# EAGLE board Arduino-Fio-Panel-v31 (EAGLE 6.5.0), part 1 of 3
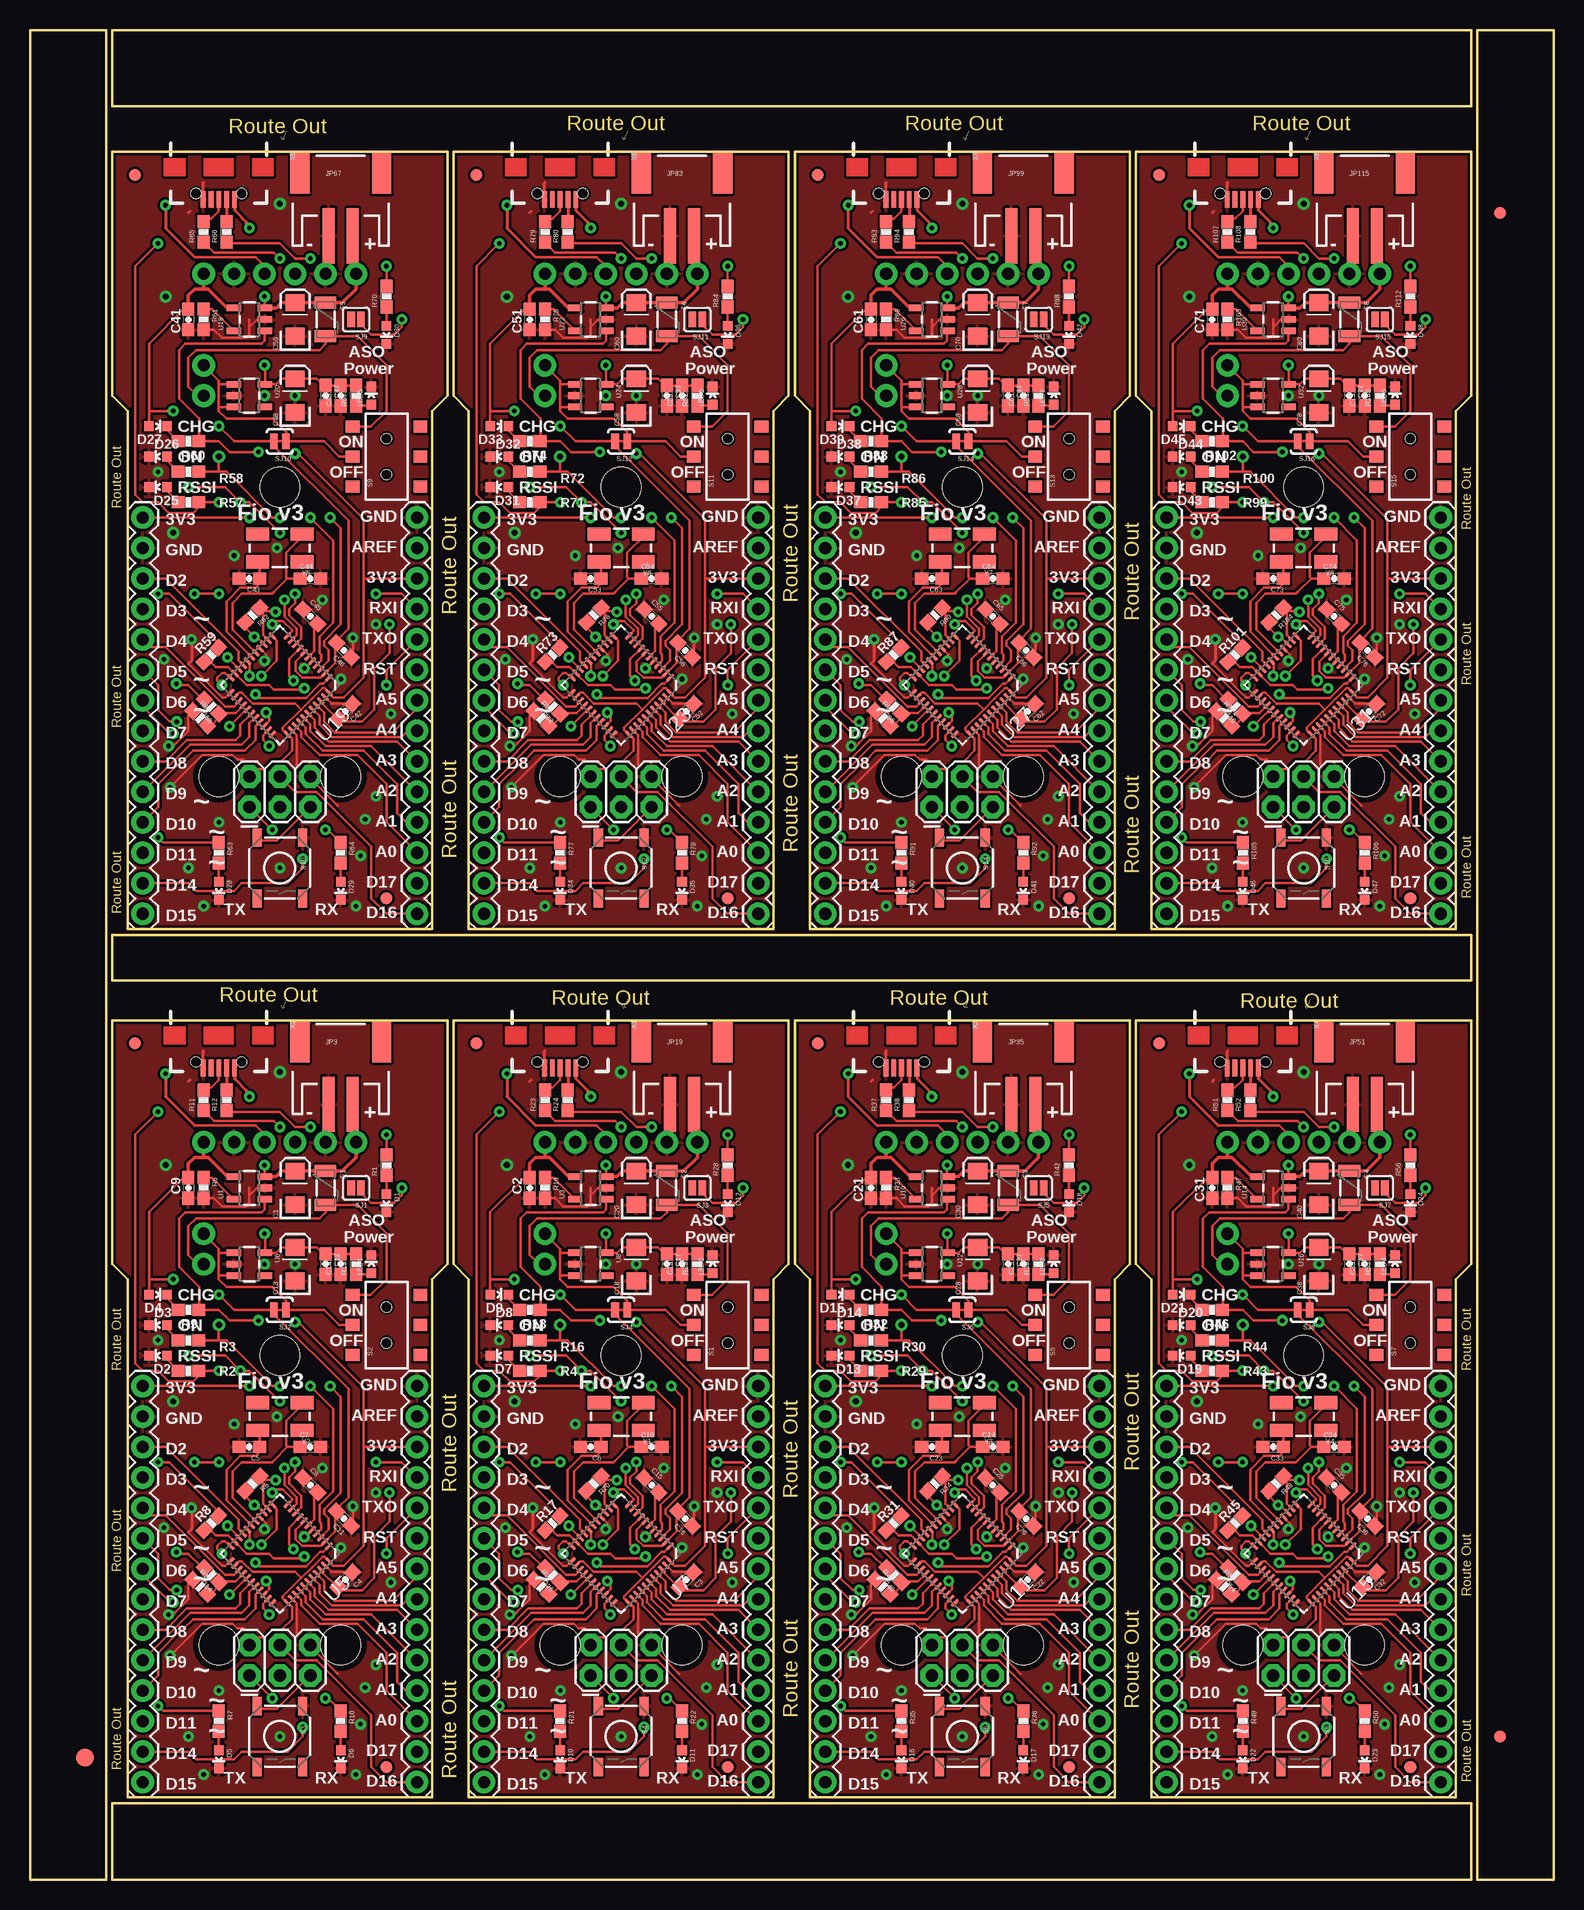
[diagram p0: board, top side]
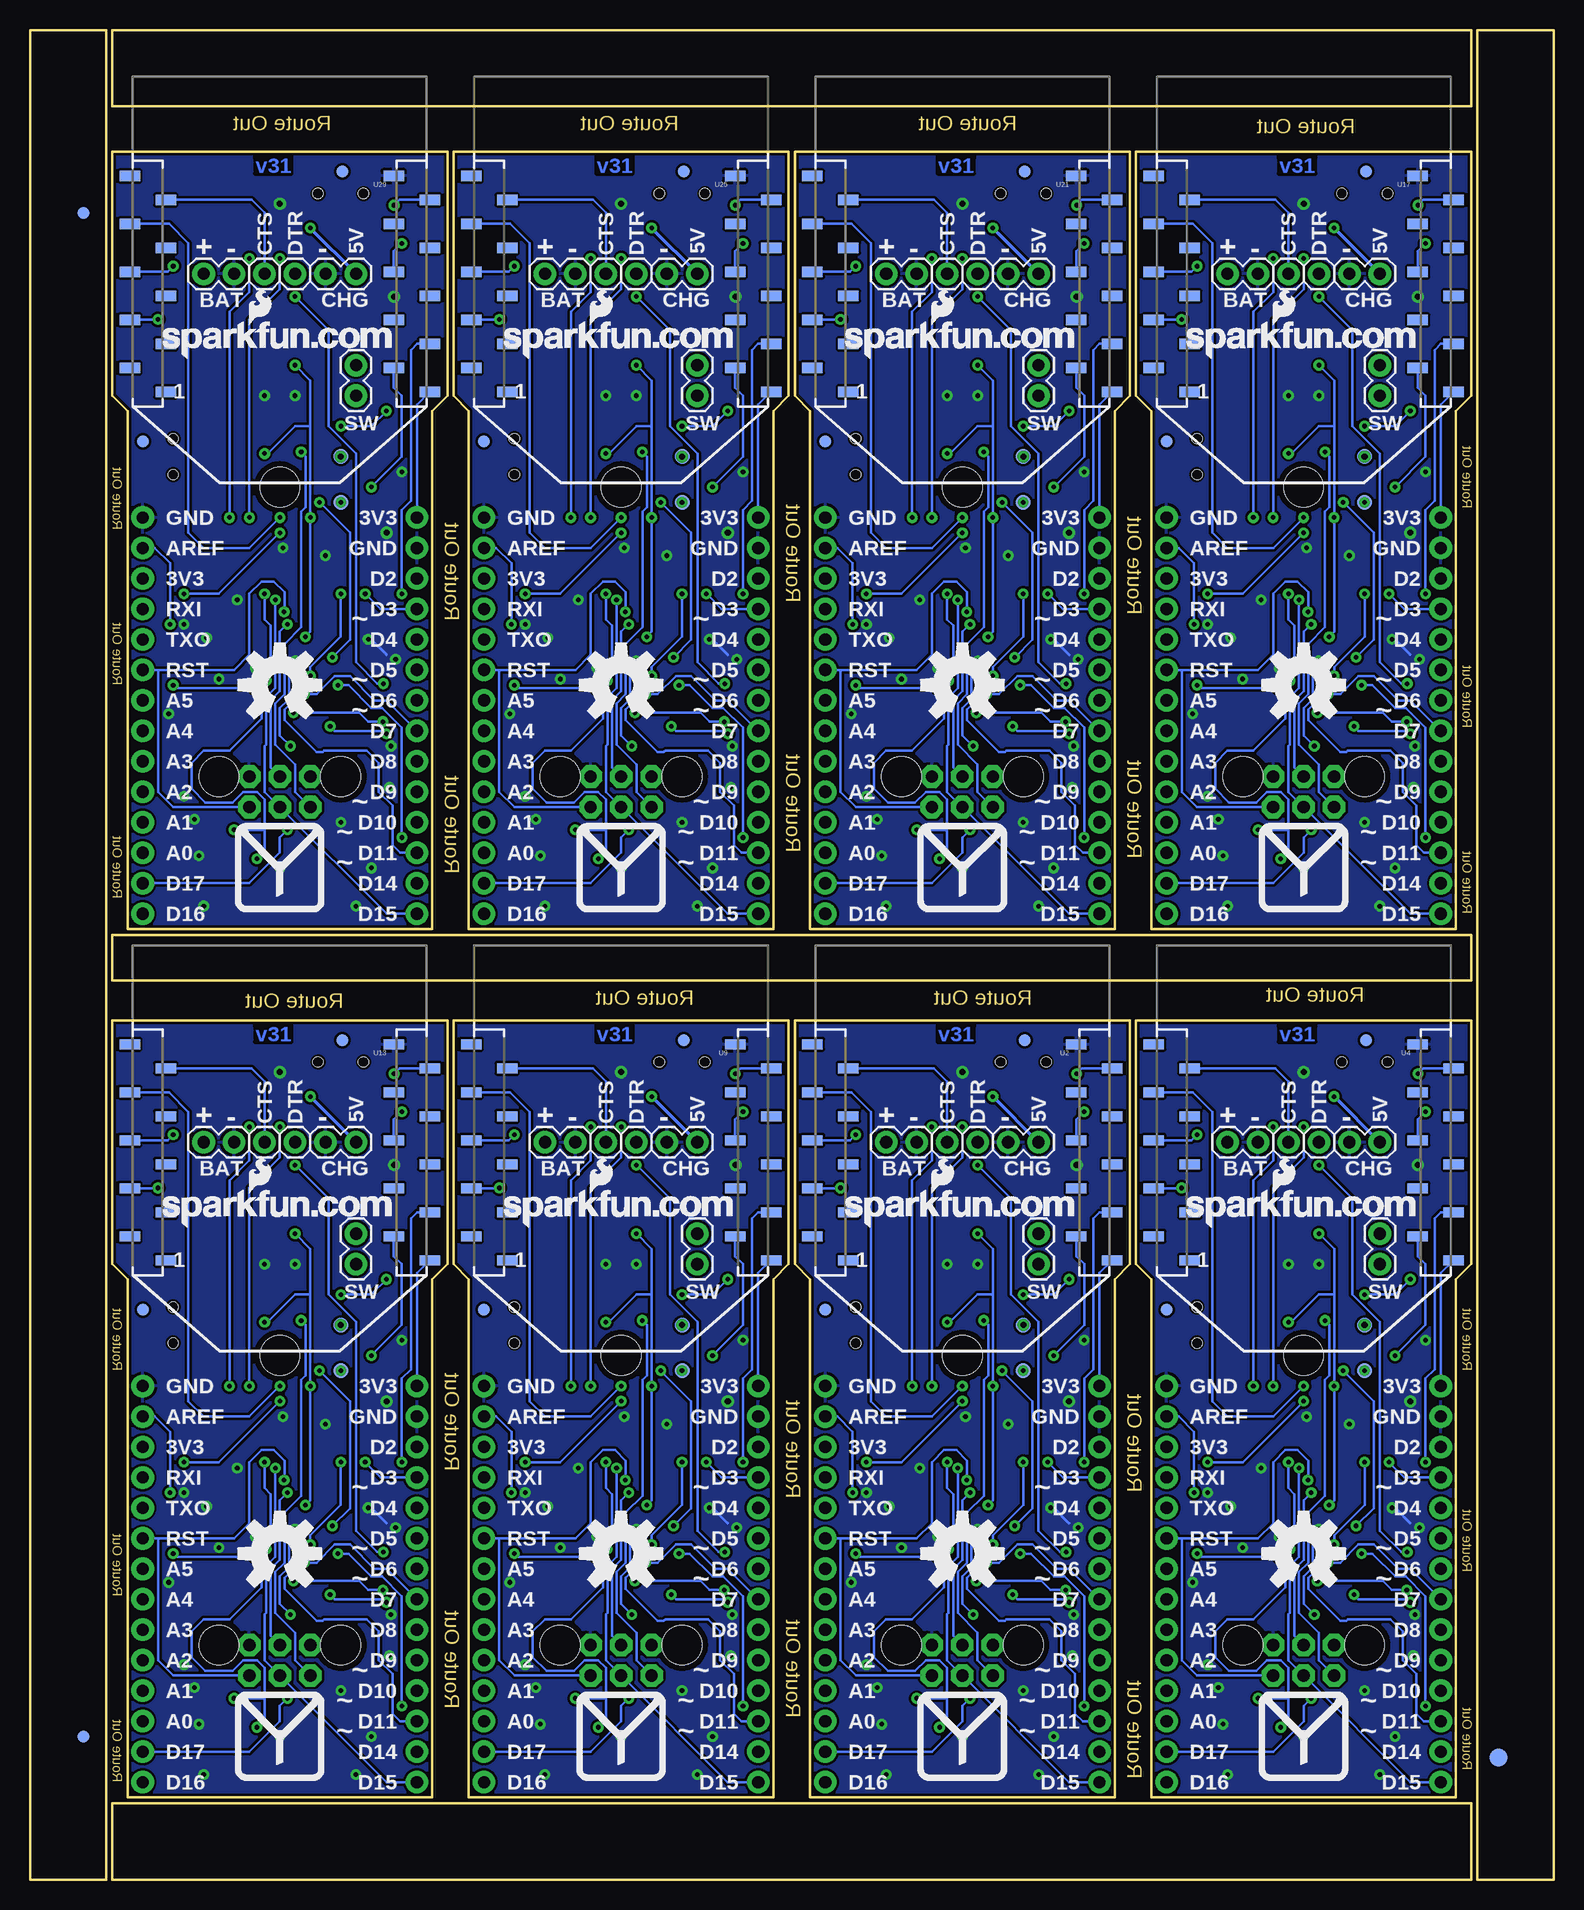
[diagram p1: board, bottom side, seen from below]

Size 127 x 154.18 mm. Coordinates in mm from the lower left corner, seen from the top.
Outline: 33.53,50.04 33.53,6.86 8.13,6.86 8.13,50.04 6.86,51.31 6.86,71.63 34.8,71.63 34.8,51.31 33.53,50.04
Outline: 61.98,50.04 61.98,6.86 36.58,6.86 36.58,50.04 35.31,51.31 35.31,71.63 63.25,71.63 63.25,51.31 61.98,50.04
Outline: 90.42,50.04 90.42,6.86 65.02,6.86 65.02,50.04 63.75,51.31 63.75,71.63 91.69,71.63 91.69,51.31 90.42,50.04
Outline: 118.87,50.04 118.87,6.86 93.47,6.86 93.47,50.04 92.2,51.31 92.2,71.63 120.14,71.63 120.14,51.31 118.87,50.04
Outline: 33.53,122.43 33.53,79.25 8.13,79.25 8.13,122.43 6.86,123.7 6.86,144.02 34.8,144.02 34.8,123.7 33.53,122.43
Outline: 61.98,122.43 61.98,79.25 36.58,79.25 36.58,122.43 35.31,123.7 35.31,144.02 63.25,144.02 63.25,123.7 61.98,122.43
Outline: 90.42,122.43 90.42,79.25 65.02,79.25 65.02,122.43 63.75,123.7 63.75,144.02 91.69,144.02 91.69,123.7 90.42,122.43
Outline: 118.87,122.43 118.87,79.25 93.47,79.25 93.47,122.43 92.2,123.7 92.2,144.02 120.14,144.02 120.14,123.7 118.87,122.43
Outline: 6.86,74.93 120.14,74.93 120.14,78.74 6.86,78.74 6.86,74.93
Outline: 6.35,0 6.35,154.18 0,154.18 0,0 6.35,0
Outline: 6.86,0 120.14,0 120.14,6.35 6.86,6.35 6.86,0
Outline: 120.65,0 127,0 127,154.18 120.65,154.18 120.65,0
Outline: 120.14,154.18 6.86,154.18 6.86,147.83 120.14,147.83 120.14,154.18
Copper layers (1*16): Top 0.035mm / dielectric 1.5mm / Bottom 0.035mm
Design rules "SparkFun *": minimum track width 7mil, minimum drill 15mil, track to track 5mil, track to pad 5mil, pad to pad 5mil, via to via 5mil, smd to smd 5mil, copper to edge 8mil, drill to drill 8mil, minimum pad ring 12mil, minimum via ring 10mil, stop-mask expansion 4mil, vias tented up to drill 20mil, thermal gap 10mil
Net classes: 0 Default: width 0.203 mm; 2 LEDPower: width 0.203 mm; 3 ButtonSignal: width 0.203 mm

## Footprints (pad centres in the part's own frame; a part is rotated, then mirrored left to right if it is on the bottom)
EIA3216 = smd 1.4 x 1.6: A 1.4,0; C -1.4,0
0603-CAP = smd 1.1 x 1: 1 -0.85,0; 2 0.85,0
LED-0603 = smd 0.8 x 0.8: A 0,-0.75; C 0,0.75
FIDUCIAL-1.5X3 = smd 1.5 x 1.5: 1 0,0
FIDUCIAL-1X2 = smd 1 x 1: 1 0,0
PTC-1206 = smd 1 x 1.8: 1 -1.4,0; 2 1.4,0
1X14 = drill 1.016 pad 1.88: 1 0,0; 2 2.54,0; 3 5.08,0; 4 7.62,0; 5 10.16,0; 6 12.7,0; 7 15.24,0; 8 17.78,0; 9 20.32,0; 10 22.86,0; 11 25.4,0; 12 27.94,0; 13 30.48,0; 14 33.02,0
JST-2-SMD = smd 1 x 4.6: 1 -1,-3.7; 2 1,-3.7 | smd 1.6 x 3.4: NC1 -3.4,1.5; NC2 3.4,1.5
2X3 = drill 1.016 pad 1.88 octagon: 1 0,0; 2 0,2.54; 3 2.54,0; 4 2.54,2.54; 5 5.08,0; 6 5.08,2.54
STAND-OFF = hole 3.302: 0,0
1X02 = drill 1.016 pad 1.88: 1 0,0; 2 2.54,0
1X01 = drill 1.016 pad 1.88: 1 0,0
0603-RES = smd 1.1 x 1: 1 -0.85,0; 2 0.85,0
AYZ0202 = smd 1 x 1.15: 1 -2.5,2.825; 2 0,2.825; 3 2.5,2.825; 4 -2.5,-2.825; 5 0,-2.825; 6 2.5,-2.825 | hole 0.85: 1.5,0; -1.5,0
TACTILE_SWITCH_SMD = smd 1.524 x 0.762: 1 -2.54,1.905; 2 2.54,1.905; 3 -2.54,-1.905; 4 2.54,-1.905
SJ_2S = smd 0.635 x 1.27: 1 -0.412,0; 2 0.412,0
SJ_2S-TRACE = smd 0.635 x 1.27: 1 -0.508,0; 2 0.508,0
PAD.03X.05 = smd 1.27 x 1.27: P$1 0,0
SOT23-5 = smd 0.55 x 1.2: 1 -0.95,-1.3; 2 0,-1.3; 3 0.95,-1.3; 4 0.95,1.3; 5 -0.95,1.3
XBEE-SMD = smd 1.7 x 0.85: 1 -12.5,20; 2 -9.5,18; 3 -12.5,16; 4 -9.5,14; 5 -12.5,12; 6 -9.5,10; 7 -12.5,8; 8 -9.5,6; 9 -12.5,4; 10 -9.5,2; 11 12.5,2; 12 9.5,4; 13 12.5,6; 14 9.5,8; 15 12.5,10; 16 9.5,12; 17 12.5,14; 18 9.5,16; 19 12.5,18; 20 9.5,20
QFN-44-NOPAD_1:1 = smd 0.8 x 0.3: 1 -3.337,2.458; 2 -3.337,1.958; 3 -3.337,1.479; 4 -3.337,0.979; 5 -3.337,0.5; 6 -3.337,0; 7 -3.337,-0.5; 8 -3.337,-0.979; 9 -3.337,-1.479; 10 -3.337,-1.958; 11 -3.337,-2.458; 23 3.337,-2.458; 24 3.337,-1.958; 25 3.337,-1.479; 26 3.337,-0.979; 27 3.337,-0.5; 28 3.337,0; 29 3.337,0.5; 30 3.337,0.979; 31 3.337,1.479; 32 3.337,1.958; 33 3.337,2.458 | smd 0.3 x 0.8: 12 -2.458,-3.337; 13 -1.958,-3.337; 14 -1.479,-3.337; 15 -0.979,-3.337; 16 -0.5,-3.337; 17 0,-3.337; 18 0.5,-3.337; 19 0.979,-3.337; 20 1.479,-3.337; 21 1.958,-3.337; 22 2.458,-3.337; 34 2.458,3.337; 35 1.958,3.337; 36 1.479,3.337; 37 0.979,3.337; 38 0.5,3.337; 39 0,3.337; 40 -0.5,3.337; 41 -0.979,3.337; 42 -1.479,3.337; 43 -1.958,3.337; 44 -2.458,3.337
USB-B-MICRO-SMD_V03 = smd 1.4 x 0.4: D+1 2.7,0; D-1 2.7,0.65; GND1 2.7,-1.3; ID1 2.7,-0.65; VBUS 2.7,1.3 | hole 0.85: 2.2,1.9; 2.2,-1.9
CRYSTAL-SMD-5X3 = smd 1.9 x 1.1: 1 -1.85,-1.15; 2 1.85,-1.15; 3 1.85,1.15; 4 -1.85,1.15

## Placement (x,y rotation side)
C1  10uF  [EIA3216]  22.1,57.66 90 top
C2  4.7uF  [0603-CAP]  41.66,57.66 270 top
C3  0.1uF  [0603-CAP]  54.72,25 225 top
C4  0.1uF  [0603-CAP]  26.27,25 225 top
C5  22pF  [0603-CAP]  18.29,36.07 180 top
C6  22pF  [0603-CAP]  46.74,36.07 180 top
C7  22pF  [0603-CAP]  23.37,36.07 0 top
C8  1uF  [0603-CAP]  23.37,32.89 315 top
C9  4.7uF  [0603-CAP]  13.21,57.66 270 top
C10  22pF  [0603-CAP]  51.82,36.07 0 top
C11  1uF  [0603-CAP]  26.16,30.1 135 top
C12  1uF  [0603-CAP]  24.64,51.31 270 top
C13  10uF  [EIA3216]  22.1,51.31 90 top
C14  0.1uF  [0603-CAP]  25.91,51.31 90 top
C15  1uF  [0603-CAP]  51.82,32.89 315 top
C16  1uF  [0603-CAP]  54.61,30.1 135 top
C17  1uF  [0603-CAP]  53.09,51.31 270 top
C18  10uF  [EIA3216]  50.55,51.31 90 top
C19  0.1uF  [0603-CAP]  54.36,51.31 90 top
C20  10uF  [EIA3216]  50.55,57.66 90 top
C21  4.7uF  [0603-CAP]  70.1,57.66 270 top
C22  0.1uF  [0603-CAP]  83.17,25 225 top
C23  22pF  [0603-CAP]  75.18,36.07 180 top
C24  22pF  [0603-CAP]  80.26,36.07 0 top
C25  1uF  [0603-CAP]  80.26,32.89 315 top
C26  1uF  [0603-CAP]  83.06,30.1 135 top
C27  1uF  [0603-CAP]  81.53,51.31 270 top
C28  10uF  [EIA3216]  78.99,51.31 90 top
C29  0.1uF  [0603-CAP]  82.8,51.31 90 top
C30  10uF  [EIA3216]  78.99,57.66 90 top
C31  4.7uF  [0603-CAP]  98.55,57.66 270 top
C32  0.1uF  [0603-CAP]  111.62,25 225 top
C33  22pF  [0603-CAP]  103.63,36.07 180 top
C34  22pF  [0603-CAP]  108.71,36.07 0 top
C35  1uF  [0603-CAP]  108.71,32.89 315 top
C36  1uF  [0603-CAP]  111.51,30.1 135 top
C37  1uF  [0603-CAP]  109.98,51.31 270 top
C38  10uF  [EIA3216]  107.44,51.31 90 top
C39  0.1uF  [0603-CAP]  111.25,51.31 90 top
C40  10uF  [EIA3216]  107.44,57.66 90 top
C41  4.7uF  [0603-CAP]  13.21,130.05 270 top
C42  0.1uF  [0603-CAP]  26.27,97.39 225 top
C43  22pF  [0603-CAP]  18.29,108.46 180 top
C44  22pF  [0603-CAP]  23.37,108.46 0 top
C45  1uF  [0603-CAP]  23.37,105.28 315 top
C46  1uF  [0603-CAP]  26.16,102.49 135 top
C47  1uF  [0603-CAP]  24.64,123.7 270 top
C48  10uF  [EIA3216]  22.1,123.7 90 top
C49  0.1uF  [0603-CAP]  25.91,123.7 90 top
C50  10uF  [EIA3216]  22.1,130.05 90 top
C51  4.7uF  [0603-CAP]  41.66,130.05 270 top
C52  0.1uF  [0603-CAP]  54.72,97.39 225 top
C53  22pF  [0603-CAP]  46.74,108.46 180 top
C54  22pF  [0603-CAP]  51.82,108.46 0 top
C55  1uF  [0603-CAP]  51.82,105.28 315 top
C56  1uF  [0603-CAP]  54.61,102.49 135 top
C57  1uF  [0603-CAP]  53.09,123.7 270 top
C58  10uF  [EIA3216]  50.55,123.7 90 top
C59  0.1uF  [0603-CAP]  54.36,123.7 90 top
C60  10uF  [EIA3216]  50.55,130.05 90 top
C61  4.7uF  [0603-CAP]  70.1,130.05 270 top
C62  0.1uF  [0603-CAP]  83.17,97.39 225 top
C63  22pF  [0603-CAP]  75.18,108.46 180 top
C64  22pF  [0603-CAP]  80.26,108.46 0 top
C65  1uF  [0603-CAP]  80.26,105.28 315 top
C66  1uF  [0603-CAP]  83.06,102.49 135 top
C67  1uF  [0603-CAP]  81.53,123.7 270 top
C68  10uF  [EIA3216]  78.99,123.7 90 top
C69  0.1uF  [0603-CAP]  82.8,123.7 90 top
C70  10uF  [EIA3216]  78.99,130.05 90 top
C71  4.7uF  [0603-CAP]  98.55,130.05 270 top
C72  0.1uF  [0603-CAP]  111.62,97.39 225 top
C73  22pF  [0603-CAP]  103.63,108.46 180 top
C74  22pF  [0603-CAP]  108.71,108.46 0 top
C75  1uF  [0603-CAP]  108.71,105.28 315 top
C76  1uF  [0603-CAP]  111.51,102.49 135 top
C77  1uF  [0603-CAP]  109.98,123.7 270 top
C78  10uF  [EIA3216]  107.44,123.7 90 top
C79  0.1uF  [0603-CAP]  111.25,123.7 90 top
C80  10uF  [EIA3216]  107.44,130.05 90 top
D1  Yellow  [LED-0603]  29.72,56.39 180 top
D2  Green  [LED-0603]  10.67,43.69 90 top
D3  Red  [LED-0603]  10.67,46.23 90 top
D4  Yellow  [LED-0603]  10.67,48.77 270 top
D5  Yellow  [LED-0603]  15.75,10.03 180 top
D6  Blue  [LED-0603]  25.91,10.03 180 top
D7  Green  [LED-0603]  39.12,43.69 90 top
D8  Red  [LED-0603]  39.12,46.23 90 top
D9  Yellow  [LED-0603]  39.12,48.77 270 top
D10  Yellow  [LED-0603]  44.2,10.03 180 top
D11  Blue  [LED-0603]  54.36,10.03 180 top
D12  Yellow  [LED-0603]  58.17,56.39 180 top
D13  Green  [LED-0603]  67.56,43.69 90 top
D14  Red  [LED-0603]  67.56,46.23 90 top
D15  Yellow  [LED-0603]  67.56,48.77 270 top
D16  Yellow  [LED-0603]  72.64,10.03 180 top
D17  Blue  [LED-0603]  82.8,10.03 180 top
D18  Yellow  [LED-0603]  86.61,56.39 180 top
D19  Green  [LED-0603]  96.01,43.69 90 top
D20  Red  [LED-0603]  96.01,46.23 90 top
D21  Yellow  [LED-0603]  96.01,48.77 270 top
D22  Yellow  [LED-0603]  101.09,10.03 180 top
D23  Blue  [LED-0603]  111.25,10.03 180 top
D24  Yellow  [LED-0603]  115.06,56.39 180 top
D25  Green  [LED-0603]  10.67,116.08 90 top
D26  Red  [LED-0603]  10.67,118.62 90 top
D27  Yellow  [LED-0603]  10.67,121.16 270 top
D28  Yellow  [LED-0603]  15.75,82.42 180 top
D29  Blue  [LED-0603]  25.91,82.42 180 top
D30  Yellow  [LED-0603]  29.72,128.78 180 top
D31  Green  [LED-0603]  39.12,116.08 90 top
D32  Red  [LED-0603]  39.12,118.62 90 top
D33  Yellow  [LED-0603]  39.12,121.16 270 top
D34  Yellow  [LED-0603]  44.2,82.42 180 top
D35  Blue  [LED-0603]  54.36,82.42 180 top
D36  Yellow  [LED-0603]  58.17,128.78 180 top
D37  Green  [LED-0603]  67.56,116.08 90 top
D38  Red  [LED-0603]  67.56,118.62 90 top
D39  Yellow  [LED-0603]  67.56,121.16 270 top
D40  Yellow  [LED-0603]  72.64,82.42 180 top
D41  Blue  [LED-0603]  82.8,82.42 180 top
D42  Yellow  [LED-0603]  86.61,128.78 180 top
D43  Green  [LED-0603]  96.01,116.08 90 top
D44  Red  [LED-0603]  96.01,118.62 90 top
D45  Yellow  [LED-0603]  96.01,121.16 270 top
D46  Yellow  [LED-0603]  101.09,82.42 180 top
D47  Blue  [LED-0603]  111.25,82.42 180 top
D48  Yellow  [LED-0603]  115.06,128.78 180 top
E$1  [FIDUCIAL-1.5X3]  4.57,10.16 0 top
E$2  [FIDUCIAL-1.5X3]  4.57,10.16 0 bottom
E$3  [FIDUCIAL-1X2]  122.56,138.94 0 bottom
E$4  [FIDUCIAL-1X2]  122.56,11.94 0 top
E$5  [FIDUCIAL-1X2]  122.56,138.94 180 top
E$6  [FIDUCIAL-1X2]  122.56,11.94 0 bottom
F1  PTCSMD  [PTC-1206]  24.64,57.66 270 top
F2  PTCSMD  [PTC-1206]  53.09,57.66 270 top
F3  PTCSMD  [PTC-1206]  81.53,57.66 270 top
F4  PTCSMD  [PTC-1206]  109.98,57.66 270 top
F5  PTCSMD  [PTC-1206]  24.64,130.05 270 top
F6  PTCSMD  [PTC-1206]  53.09,130.05 270 top
F7  PTCSMD  [PTC-1206]  81.53,130.05 270 top
F8  PTCSMD  [PTC-1206]  109.98,130.05 270 top
JP1  M14  [1X14]  9.4,41.15 270 top
JP2  M14  [1X14]  32.26,41.15 270 top
JP3  [JST-2-SMD]  25.91,68.33 0 top
JP4  AVR_SPI  [2X3]  18.29,17.02 0 top
JP5  STAND-OFF  [STAND-OFF]  15.75,19.56 0 top
JP6  External Charge  [1X02]  17.02,61.47 0 bottom
JP7  External Switch  [1X02]  14.48,53.85 270 bottom
JP8  [1X01]  22.1,61.47 0 bottom
JP9  [1X01]  19.56,61.47 0 bottom
JP10  FIDUCIALUFIDUCIAL  [FIDUCIAL-1X2]  29.72,9.4 0 top
JP11  FIDUCIALUFIDUCIAL  [FIDUCIAL-1X2]  8.76,69.72 0 top
JP12  FIDUCIALUFIDUCIAL  [FIDUCIAL-1X2]  15.62,69.98 0 bottom
JP13  FIDUCIALUFIDUCIAL  [FIDUCIAL-1X2]  32.26,47.5 0 bottom
JP14  External Power  [1X02]  24.64,61.47 180 bottom
JP15  AVR_SPI  [2X3]  46.74,17.02 0 top
JP16  STAND-OFF  [STAND-OFF]  20.83,43.69 0 top
JP17  STAND-OFF  [STAND-OFF]  25.91,19.56 0 top
JP18  M14  [1X14]  37.85,41.15 270 top
JP19  [JST-2-SMD]  54.36,68.33 0 top
JP20  External Power  [1X02]  53.09,61.47 180 bottom
JP21  External Charge  [1X02]  45.47,61.47 0 bottom
JP22  External Switch  [1X02]  42.93,53.85 270 bottom
JP23  [1X01]  50.55,61.47 0 bottom
JP24  [1X01]  48.01,61.47 0 bottom
JP25  FIDUCIALUFIDUCIAL  [FIDUCIAL-1X2]  58.17,9.4 0 top
JP26  FIDUCIALUFIDUCIAL  [FIDUCIAL-1X2]  37.21,69.72 0 top
JP27  FIDUCIALUFIDUCIAL  [FIDUCIAL-1X2]  44.07,69.98 0 bottom
JP28  FIDUCIALUFIDUCIAL  [FIDUCIAL-1X2]  60.71,47.5 0 bottom
JP29  M14  [1X14]  60.71,41.15 270 top
JP30  STAND-OFF  [STAND-OFF]  49.28,43.69 0 top
JP31  STAND-OFF  [STAND-OFF]  54.36,19.56 0 top
JP32  STAND-OFF  [STAND-OFF]  44.2,19.56 0 top
JP33  AVR_SPI  [2X3]  75.18,17.02 0 top
JP34  M14  [1X14]  66.29,41.15 270 top
JP35  [JST-2-SMD]  82.8,68.33 0 top
JP36  External Power  [1X02]  81.53,61.47 180 bottom
JP37  External Charge  [1X02]  73.91,61.47 0 bottom
JP38  External Switch  [1X02]  71.37,53.85 270 bottom
JP39  [1X01]  78.99,61.47 0 bottom
JP40  [1X01]  76.45,61.47 0 bottom
JP41  FIDUCIALUFIDUCIAL  [FIDUCIAL-1X2]  86.61,9.4 0 top
JP42  FIDUCIALUFIDUCIAL  [FIDUCIAL-1X2]  65.66,69.72 0 top
JP43  FIDUCIALUFIDUCIAL  [FIDUCIAL-1X2]  72.52,69.98 0 bottom
JP44  FIDUCIALUFIDUCIAL  [FIDUCIAL-1X2]  89.15,47.5 0 bottom
JP45  M14  [1X14]  89.15,41.15 270 top
JP46  STAND-OFF  [STAND-OFF]  77.72,43.69 0 top
JP47  STAND-OFF  [STAND-OFF]  82.8,19.56 0 top
JP48  STAND-OFF  [STAND-OFF]  72.64,19.56 0 top
JP49  AVR_SPI  [2X3]  103.63,17.02 0 top
JP50  M14  [1X14]  94.74,41.15 270 top
JP51  [JST-2-SMD]  111.25,68.33 0 top
JP52  External Power  [1X02]  109.98,61.47 180 bottom
JP53  External Charge  [1X02]  102.36,61.47 0 bottom
JP54  External Switch  [1X02]  99.82,53.85 270 bottom
JP55  [1X01]  107.44,61.47 0 bottom
JP56  [1X01]  104.9,61.47 0 bottom
JP57  FIDUCIALUFIDUCIAL  [FIDUCIAL-1X2]  115.06,9.4 0 top
JP58  FIDUCIALUFIDUCIAL  [FIDUCIAL-1X2]  94.11,69.72 0 top
JP59  FIDUCIALUFIDUCIAL  [FIDUCIAL-1X2]  100.97,69.98 0 bottom
JP60  FIDUCIALUFIDUCIAL  [FIDUCIAL-1X2]  117.6,47.5 0 bottom
JP61  M14  [1X14]  117.6,41.15 270 top
JP62  STAND-OFF  [STAND-OFF]  106.17,43.69 0 top
JP63  STAND-OFF  [STAND-OFF]  111.25,19.56 0 top
JP64  STAND-OFF  [STAND-OFF]  101.09,19.56 0 top
JP65  AVR_SPI  [2X3]  18.29,89.41 0 top
JP66  M14  [1X14]  9.4,113.54 270 top
JP67  [JST-2-SMD]  25.91,140.72 0 top
JP68  External Power  [1X02]  24.64,133.86 180 bottom
JP69  External Charge  [1X02]  17.02,133.86 0 bottom
JP70  External Switch  [1X02]  14.48,126.24 270 bottom
JP71  [1X01]  22.1,133.86 0 bottom
JP72  [1X01]  19.56,133.86 0 bottom
JP73  FIDUCIALUFIDUCIAL  [FIDUCIAL-1X2]  29.72,81.79 0 top
JP74  FIDUCIALUFIDUCIAL  [FIDUCIAL-1X2]  8.76,142.11 0 top
JP75  FIDUCIALUFIDUCIAL  [FIDUCIAL-1X2]  15.62,142.37 0 bottom
JP76  FIDUCIALUFIDUCIAL  [FIDUCIAL-1X2]  32.26,119.89 0 bottom
JP77  M14  [1X14]  32.26,113.54 270 top
JP78  STAND-OFF  [STAND-OFF]  20.83,116.08 0 top
JP79  STAND-OFF  [STAND-OFF]  25.91,91.95 0 top
JP80  STAND-OFF  [STAND-OFF]  15.75,91.95 0 top
JP81  AVR_SPI  [2X3]  46.74,89.41 0 top
JP82  M14  [1X14]  37.85,113.54 270 top
JP83  [JST-2-SMD]  54.36,140.72 0 top
JP84  External Power  [1X02]  53.09,133.86 180 bottom
JP85  External Charge  [1X02]  45.47,133.86 0 bottom
JP86  External Switch  [1X02]  42.93,126.24 270 bottom
JP87  [1X01]  50.55,133.86 0 bottom
JP88  [1X01]  48.01,133.86 0 bottom
JP89  FIDUCIALUFIDUCIAL  [FIDUCIAL-1X2]  58.17,81.79 0 top
JP90  FIDUCIALUFIDUCIAL  [FIDUCIAL-1X2]  37.21,142.11 0 top
JP91  FIDUCIALUFIDUCIAL  [FIDUCIAL-1X2]  44.07,142.37 0 bottom
JP92  FIDUCIALUFIDUCIAL  [FIDUCIAL-1X2]  60.71,119.89 0 bottom
JP93  M14  [1X14]  60.71,113.54 270 top
JP94  STAND-OFF  [STAND-OFF]  49.28,116.08 0 top
JP95  STAND-OFF  [STAND-OFF]  54.36,91.95 0 top
JP96  STAND-OFF  [STAND-OFF]  44.2,91.95 0 top
JP97  AVR_SPI  [2X3]  75.18,89.41 0 top
JP98  M14  [1X14]  66.29,113.54 270 top
JP99  [JST-2-SMD]  82.8,140.72 0 top
JP100  External Power  [1X02]  81.53,133.86 180 bottom
JP101  External Charge  [1X02]  73.91,133.86 0 bottom
JP102  External Switch  [1X02]  71.37,126.24 270 bottom
JP103  [1X01]  78.99,133.86 0 bottom
JP104  [1X01]  76.45,133.86 0 bottom
JP105  FIDUCIALUFIDUCIAL  [FIDUCIAL-1X2]  86.61,81.79 0 top
JP106  FIDUCIALUFIDUCIAL  [FIDUCIAL-1X2]  65.66,142.11 0 top
JP107  FIDUCIALUFIDUCIAL  [FIDUCIAL-1X2]  72.52,142.37 0 bottom
JP108  FIDUCIALUFIDUCIAL  [FIDUCIAL-1X2]  89.15,119.89 0 bottom
JP109  M14  [1X14]  89.15,113.54 270 top
JP110  STAND-OFF  [STAND-OFF]  77.72,116.08 0 top
JP111  STAND-OFF  [STAND-OFF]  82.8,91.95 0 top
JP112  STAND-OFF  [STAND-OFF]  72.64,91.95 0 top
JP113  AVR_SPI  [2X3]  103.63,89.41 0 top
JP114  M14  [1X14]  94.74,113.54 270 top
JP115  [JST-2-SMD]  111.25,140.72 0 top
JP116  External Power  [1X02]  109.98,133.86 180 bottom
JP117  External Charge  [1X02]  102.36,133.86 0 bottom
JP118  External Switch  [1X02]  99.82,126.24 270 bottom
JP119  [1X01]  107.44,133.86 0 bottom
JP120  [1X01]  104.9,133.86 0 bottom
JP121  FIDUCIALUFIDUCIAL  [FIDUCIAL-1X2]  115.06,81.79 0 top
JP122  FIDUCIALUFIDUCIAL  [FIDUCIAL-1X2]  94.11,142.11 0 top
JP123  FIDUCIALUFIDUCIAL  [FIDUCIAL-1X2]  100.97,142.37 0 bottom
JP124  FIDUCIALUFIDUCIAL  [FIDUCIAL-1X2]  117.6,119.89 0 bottom
JP125  M14  [1X14]  117.6,113.54 270 top
JP126  STAND-OFF  [STAND-OFF]  106.17,116.08 0 top
JP127  STAND-OFF  [STAND-OFF]  111.25,91.95 0 top
JP128  STAND-OFF  [STAND-OFF]  101.09,91.95 0 top
LED1  Red  [LED-0603]  28.45,51.31 0 top
LED2  Red  [LED-0603]  56.9,51.31 0 top
LED3  Red  [LED-0603]  85.34,51.31 0 top
LED4  Red  [LED-0603]  113.79,51.31 0 top
LED5  Red  [LED-0603]  28.45,123.7 0 top
LED6  Red  [LED-0603]  56.9,123.7 0 top
LED7  Red  [LED-0603]  85.34,123.7 0 top
LED8  Red  [LED-0603]  113.79,123.7 0 top
LOGO1  OSHW-LOGOL  [OSHW-LOGO-L]  20.83,27.18 0 bottom
LOGO2  OSHW-LOGOL  [OSHW-LOGO-L]  49.28,27.18 0 bottom
LOGO3  OSHW-LOGOL  [OSHW-LOGO-L]  77.72,27.18 0 bottom
LOGO4  OSHW-LOGOL  [OSHW-LOGO-L]  106.17,27.18 0 bottom
LOGO5  OSHW-LOGOL  [OSHW-LOGO-L]  20.83,99.57 0 bottom
LOGO6  OSHW-LOGOL  [OSHW-LOGO-L]  49.28,99.57 0 bottom
LOGO7  OSHW-LOGOL  [OSHW-LOGO-L]  77.72,99.57 0 bottom
LOGO8  OSHW-LOGOL  [OSHW-LOGO-L]  106.17,99.57 0 bottom
R1  330  [0603-RES]  29.72,59.56 90 top
R2  330  [0603-RES]  13.21,42.42 0 top
R3  330  [0603-RES]  13.21,44.96 0 top
R4  330  [0603-RES]  41.66,42.42 0 top
R5  2K  [0603-RES]  14.48,57.66 270 top
R6  10K  [0603-RES]  18.54,33.02 225 top
R7  330  [0603-RES]  15.75,13.21 270 top
R8  100  [0603-RES]  15.11,29.72 45 top
R9  470  [0603-RES]  13.21,47.5 180 top
R10  330  [0603-RES]  25.91,13.21 270 top
R11  22  [0603-RES]  14.48,64.96 90 top
R12  22  [0603-RES]  16.38,64.96 90 top
R13  330  [0603-RES]  27.18,51.31 90 top
R14  1k  [0603-RES]  15.14,25.39 135 top
R15  1k  [0603-RES]  14.19,24.41 315 top
R16  330  [0603-RES]  41.66,44.96 0 top
R17  100  [0603-RES]  43.56,29.72 45 top
R18  470  [0603-RES]  41.66,47.5 180 top
R19  2K  [0603-RES]  42.93,57.66 270 top
R20  10K  [0603-RES]  46.99,33.02 225 top
R21  330  [0603-RES]  44.2,13.21 270 top
R22  330  [0603-RES]  54.36,13.21 270 top
R23  22  [0603-RES]  42.93,64.96 90 top
R24  22  [0603-RES]  44.83,64.96 90 top
R25  330  [0603-RES]  55.63,51.31 90 top
R26  1k  [0603-RES]  43.59,25.39 135 top
R27  1k  [0603-RES]  42.64,24.41 315 top
R28  330  [0603-RES]  58.17,59.56 90 top
R29  330  [0603-RES]  70.1,42.42 0 top
R30  330  [0603-RES]  70.1,44.96 0 top
R31  100  [0603-RES]  72.01,29.72 45 top
R32  470  [0603-RES]  70.1,47.5 180 top
R33  2K  [0603-RES]  71.37,57.66 270 top
R34  10K  [0603-RES]  75.44,33.02 225 top
R35  330  [0603-RES]  72.64,13.21 270 top
R36  330  [0603-RES]  82.8,13.21 270 top
R37  22  [0603-RES]  71.37,64.96 90 top
R38  22  [0603-RES]  73.28,64.96 90 top
R39  330  [0603-RES]  84.07,51.31 90 top
R40  1k  [0603-RES]  72.04,25.39 135 top
R41  1k  [0603-RES]  71.08,24.41 315 top
R42  330  [0603-RES]  86.61,59.56 90 top
R43  330  [0603-RES]  98.55,42.42 0 top
R44  330  [0603-RES]  98.55,44.96 0 top
R45  100  [0603-RES]  100.46,29.72 45 top
R46  470  [0603-RES]  98.55,47.5 180 top
R47  2K  [0603-RES]  99.82,57.66 270 top
R48  10K  [0603-RES]  103.89,33.02 225 top
R49  330  [0603-RES]  101.09,13.21 270 top
R50  330  [0603-RES]  111.25,13.21 270 top
R51  22  [0603-RES]  99.82,64.96 90 top
R52  22  [0603-RES]  101.73,64.96 90 top
R53  330  [0603-RES]  112.52,51.31 90 top
R54  1k  [0603-RES]  100.49,25.39 135 top
R55  1k  [0603-RES]  99.53,24.41 315 top
R56  330  [0603-RES]  115.06,59.56 90 top
R57  330  [0603-RES]  13.21,114.81 0 top
R58  330  [0603-RES]  13.21,117.35 0 top
R59  100  [0603-RES]  15.11,102.11 45 top
R60  470  [0603-RES]  13.21,119.89 180 top
R61  2K  [0603-RES]  14.48,130.05 270 top
R62  10K  [0603-RES]  18.54,105.41 225 top
R63  330  [0603-RES]  15.75,85.6 270 top
R64  330  [0603-RES]  25.91,85.6 270 top
R65  22  [0603-RES]  14.48,137.35 90 top
R66  22  [0603-RES]  16.38,137.35 90 top
R67  330  [0603-RES]  27.18,123.7 90 top
R68  1k  [0603-RES]  15.14,97.78 135 top
R69  1k  [0603-RES]  14.19,96.8 315 top
R70  330  [0603-RES]  29.72,131.95 90 top
R71  330  [0603-RES]  41.66,114.81 0 top
R72  330  [0603-RES]  41.66,117.35 0 top
R73  100  [0603-RES]  43.56,102.11 45 top
R74  470  [0603-RES]  41.66,119.89 180 top
R75  2K  [0603-RES]  42.93,130.05 270 top
R76  10K  [0603-RES]  46.99,105.41 225 top
R77  330  [0603-RES]  44.2,85.6 270 top
R78  330  [0603-RES]  54.36,85.6 270 top
R79  22  [0603-RES]  42.93,137.35 90 top
R80  22  [0603-RES]  44.83,137.35 90 top
R81  330  [0603-RES]  55.63,123.7 90 top
R82  1k  [0603-RES]  43.59,97.78 135 top
R83  1k  [0603-RES]  42.64,96.8 315 top
R84  330  [0603-RES]  58.17,131.95 90 top
R85  330  [0603-RES]  70.1,114.81 0 top
R86  330  [0603-RES]  70.1,117.35 0 top
R87  100  [0603-RES]  72.01,102.11 45 top
R88  470  [0603-RES]  70.1,119.89 180 top
R89  2K  [0603-RES]  71.37,130.05 270 top
R90  10K  [0603-RES]  75.44,105.41 225 top
R91  330  [0603-RES]  72.64,85.6 270 top
R92  330  [0603-RES]  82.8,85.6 270 top
R93  22  [0603-RES]  71.37,137.35 90 top
R94  22  [0603-RES]  73.28,137.35 90 top
R95  330  [0603-RES]  84.07,123.7 90 top
R96  1k  [0603-RES]  72.04,97.78 135 top
R97  1k  [0603-RES]  71.08,96.8 315 top
R98  330  [0603-RES]  86.61,131.95 90 top
R99  330  [0603-RES]  98.55,114.81 0 top
R100  330  [0603-RES]  98.55,117.35 0 top
R101  100  [0603-RES]  100.46,102.11 45 top
R102  470  [0603-RES]  98.55,119.89 180 top
R103  2K  [0603-RES]  99.82,130.05 270 top
R104  10K  [0603-RES]  103.89,105.41 225 top
R105  330  [0603-RES]  101.09,85.6 270 top
R106  330  [0603-RES]  111.25,85.6 270 top
R107  22  [0603-RES]  99.82,137.35 90 top
R108  22  [0603-RES]  101.73,137.35 90 top
R109  330  [0603-RES]  112.52,123.7 90 top
R110  1k  [0603-RES]  100.49,97.78 135 top
R111  1k  [0603-RES]  99.53,96.8 315 top
R112  330  [0603-RES]  115.06,131.95 90 top
S1  Power Switch  [AYZ0202]  58.17,46.23 90 top
S2  Power Switch  [AYZ0202]  29.72,46.23 90 top
S3  Reset  [TACTILE_SWITCH_SMD]  20.83,11.94 270 top
S4  Reset  [TACTILE_SWITCH_SMD]  49.28,11.94 270 top
S5  Power Switch  [AYZ0202]  86.61,46.23 90 top
S6  Reset  [TACTILE_SWITCH_SMD]  77.72,11.94 270 top
S7  Power Switch  [AYZ0202]  115.06,46.23 90 top
S8  Reset  [TACTILE_SWITCH_SMD]  106.17,11.94 270 top
S9  Power Switch  [AYZ0202]  29.72,118.62 90 top
S10  Reset  [TACTILE_SWITCH_SMD]  20.83,84.33 270 top
S11  Power Switch  [AYZ0202]  58.17,118.62 90 top
S12  Reset  [TACTILE_SWITCH_SMD]  49.28,84.33 270 top
S13  Power Switch  [AYZ0202]  86.61,118.62 90 top
S14  Reset  [TACTILE_SWITCH_SMD]  77.72,84.33 270 top
S15  Power Switch  [AYZ0202]  115.06,118.62 90 top
S16  Reset  [TACTILE_SWITCH_SMD]  106.17,84.33 270 top
SJ1  SOLDERJUMPERNC  [SJ_2S]  27.18,57.66 180 top
SJ2  USB Power  [SJ_2S-TRACE]  20.83,47.5 180 top
SJ3  SOLDERJUMPERNC  [SJ_2S]  55.63,57.66 180 top
SJ4  USB Power  [SJ_2S-TRACE]  49.28,47.5 180 top
SJ5  SOLDERJUMPERNC  [SJ_2S]  84.07,57.66 180 top
SJ6  USB Power  [SJ_2S-TRACE]  77.72,47.5 180 top
SJ7  SOLDERJUMPERNC  [SJ_2S]  112.52,57.66 180 top
SJ8  USB Power  [SJ_2S-TRACE]  106.17,47.5 180 top
SJ9  SOLDERJUMPERNC  [SJ_2S]  27.18,130.05 180 top
SJ10  USB Power  [SJ_2S-TRACE]  20.83,119.89 180 top
SJ11  SOLDERJUMPERNC  [SJ_2S]  55.63,130.05 180 top
SJ12  USB Power  [SJ_2S-TRACE]  49.28,119.89 180 top
SJ13  SOLDERJUMPERNC  [SJ_2S]  84.07,130.05 180 top
SJ14  USB Power  [SJ_2S-TRACE]  77.72,119.89 180 top
SJ15  SOLDERJUMPERNC  [SJ_2S]  112.52,130.05 180 top
SJ16  USB Power  [SJ_2S-TRACE]  106.17,119.89 180 top
TP1  RSSI  [PAD.03X.05]  15.75,42.42 0 bottom
TP2  ON  [PAD.03X.05]  15.75,46.23 0 bottom
TP3  RSSI  [PAD.03X.05]  44.2,42.42 0 bottom
TP4  ON  [PAD.03X.05]  44.2,46.23 0 bottom
TP5  RSSI  [PAD.03X.05]  72.64,42.42 0 bottom
TP6  ON  [PAD.03X.05]  72.64,46.23 0 bottom
TP7  RSSI  [PAD.03X.05]  101.09,42.42 0 bottom
TP8  ON  [PAD.03X.05]  101.09,46.23 0 bottom
TP9  RSSI  [PAD.03X.05]  15.75,114.81 0 bottom
TP10  ON  [PAD.03X.05]  15.75,118.62 0 bottom
TP11  RSSI  [PAD.03X.05]  44.2,114.81 0 bottom
TP12  ON  [PAD.03X.05]  44.2,118.62 0 bottom
TP13  RSSI  [PAD.03X.05]  72.64,114.81 0 bottom
TP14  ON  [PAD.03X.05]  72.64,118.62 0 bottom
TP15  RSSI  [PAD.03X.05]  101.09,114.81 0 bottom
TP16  ON  [PAD.03X.05]  101.09,118.62 0 bottom
U1  MCP73831  [SOT23-5]  18.29,57.66 90 top
U2  XBEE  [XBEE-SMD]  49.28,71.63 180 bottom
U3  MCP73831  [SOT23-5]  46.74,57.66 90 top
U4  XBEE  [XBEE-SMD]  20.83,71.63 180 bottom
U5  ATMEGA32U4  [QFN-44-NOPAD_1:1]  20.83,27.18 225 top
U6  MIC5219-3.3  [SOT23-5]  18.29,51.31 270 top
U7  ATMEGA32U4  [QFN-44-NOPAD_1:1]  49.28,27.18 225 top
U8  MIC5219-3.3  [SOT23-5]  46.74,51.31 270 top
U9  XBEE  [XBEE-SMD]  77.72,71.63 180 bottom
U10  MCP73831  [SOT23-5]  75.18,57.66 90 top
U11  ATMEGA32U4  [QFN-44-NOPAD_1:1]  77.72,27.18 225 top
U12  MIC5219-3.3  [SOT23-5]  75.18,51.31 270 top
U13  XBEE  [XBEE-SMD]  106.17,71.63 180 bottom
U14  MCP73831  [SOT23-5]  103.63,57.66 90 top
U15  ATMEGA32U4  [QFN-44-NOPAD_1:1]  106.17,27.18 225 top
U16  MIC5219-3.3  [SOT23-5]  103.63,51.31 270 top
U17  XBEE  [XBEE-SMD]  20.83,144.02 180 bottom
U18  MCP73831  [SOT23-5]  18.29,130.05 90 top
U19  ATMEGA32U4  [QFN-44-NOPAD_1:1]  20.83,99.57 225 top
U20  MIC5219-3.3  [SOT23-5]  18.29,123.7 270 top
U21  XBEE  [XBEE-SMD]  49.28,144.02 180 bottom
U22  MCP73831  [SOT23-5]  46.74,130.05 90 top
U23  ATMEGA32U4  [QFN-44-NOPAD_1:1]  49.28,99.57 225 top
U24  MIC5219-3.3  [SOT23-5]  46.74,123.7 270 top
U25  XBEE  [XBEE-SMD]  77.72,144.02 180 bottom
U26  MCP73831  [SOT23-5]  75.18,130.05 90 top
U27  ATMEGA32U4  [QFN-44-NOPAD_1:1]  77.72,99.57 225 top
U28  MIC5219-3.3  [SOT23-5]  75.18,123.7 270 top
U29  XBEE  [XBEE-SMD]  106.17,144.02 180 bottom
U30  MCP73831  [SOT23-5]  103.63,130.05 90 top
U31  ATMEGA32U4  [QFN-44-NOPAD_1:1]  106.17,99.57 225 top
U32  MIC5219-3.3  [SOT23-5]  103.63,123.7 270 top
U$1  LOGO-SFENEW  [SFE-NEW-WEBLOGO]  30.61,54.36 0 bottom
U$2  LOGO-SFENEW  [SFE-NEW-WEBLOGO]  59.05,54.36 0 bottom
U$3  FIO_LOGOV2  [FUNNEL_LOGO_BOTTOM_V2]  49.28,11.94 0 top
U$4  LOGO-SFENEW  [SFE-NEW-WEBLOGO]  87.5,54.36 0 bottom
U$5  FIO_LOGOV2  [FUNNEL_LOGO_BOTTOM_V2]  77.72,11.94 0 top
U$6  FIO_LOGOV2  [FUNNEL_LOGO_BOTTOM_V2]  20.83,11.94 0 top
U$7  LOGO-SFENEW  [SFE-NEW-WEBLOGO]  115.95,54.36 0 bottom
U$8  FIO_LOGOV2  [FUNNEL_LOGO_BOTTOM_V2]  106.17,11.94 0 top
U$9  LOGO-SFENEW  [SFE-NEW-WEBLOGO]  30.61,126.75 0 bottom
U$10  FIO_LOGOV2  [FUNNEL_LOGO_BOTTOM_V2]  20.83,84.33 0 top
U$11  LOGO-SFENEW  [SFE-NEW-WEBLOGO]  59.05,126.75 0 bottom
U$12  FIO_LOGOV2  [FUNNEL_LOGO_BOTTOM_V2]  49.28,84.33 0 top
U$13  LOGO-SFENEW  [SFE-NEW-WEBLOGO]  87.5,126.75 0 bottom
U$14  FIO_LOGOV2  [FUNNEL_LOGO_BOTTOM_V2]  77.72,84.33 0 top
U$15  LOGO-SFENEW  [SFE-NEW-WEBLOGO]  115.95,126.75 0 bottom
U$16  FIO_LOGOV2  [FUNNEL_LOGO_BOTTOM_V2]  106.17,84.33 0 top
X1  USB_MICROB_PLUGCONN-11752  [USB-B-MICRO-SMD_V03]  44.2,70.36 270 top
X2  USB_MICROB_PLUGCONN-11752  [USB-B-MICRO-SMD_V03]  15.75,70.36 270 top
X3  USB_MICROB_PLUGCONN-11752  [USB-B-MICRO-SMD_V03]  72.64,70.36 270 top
X4  USB_MICROB_PLUGCONN-11752  [USB-B-MICRO-SMD_V03]  101.09,70.36 270 top
X5  USB_MICROB_PLUGCONN-11752  [USB-B-MICRO-SMD_V03]  15.75,142.75 270 top
X6  USB_MICROB_PLUGCONN-11752  [USB-B-MICRO-SMD_V03]  44.2,142.75 270 top
X7  USB_MICROB_PLUGCONN-11752  [USB-B-MICRO-SMD_V03]  72.64,142.75 270 top
X8  USB_MICROB_PLUGCONN-11752  [USB-B-MICRO-SMD_V03]  101.09,142.75 270 top
Y1  8MHz  [CRYSTAL-SMD-5X3]  49.28,38.61 180 top
Y2  8MHz  [CRYSTAL-SMD-5X3]  20.83,38.61 180 top
Y3  8MHz  [CRYSTAL-SMD-5X3]  77.72,38.61 180 top
Y4  8MHz  [CRYSTAL-SMD-5X3]  106.17,38.61 180 top
Y5  8MHz  [CRYSTAL-SMD-5X3]  20.83,111 180 top
Y6  8MHz  [CRYSTAL-SMD-5X3]  49.28,111 180 top
Y7  8MHz  [CRYSTAL-SMD-5X3]  77.72,111 180 top
Y8  8MHz  [CRYSTAL-SMD-5X3]  106.17,111 180 top

## Library data of the parts
C1 C13 C18 C20 C28 C30 C38 C40 C48 C50 C58 C60 C68 C70 C78 C80 D1-D48 F1-F8 JP1-JP128 LED1-LED8 S1-S16 SJ1-SJ16 TP1-TP16 U1-U4 U6 U8-U10 U12-U14 U16-U18 U20-U22 U24-U26 U28-U30 U32 U$1-U$16 Y1-Y8 = SparkFun
C2-C12 C14-C17 C19 C21-C27 C29 C31-C37 C39 C41-C47 C49 C51-C57 C59 C61-C67 C69 C71-C77 C79 = SparkFun-Capacitors
E$1-E$6 LOGO1-LOGO8 = SparkFun-Aesthetics
R1-R112 = SparkFun-Resistors
U5 U7 U11 U15 U19 U23 U27 U31 = Testing
X1-X8 = SparkFun-Connectors; PROD_ID: CONN-11752

## Nets
3.3V [vcc]: C12.1 C13.A C14.2 JP1.1 JP2.3 JP4.2 R6.2 R13.2 U4.1 U5.14 U5.24 U5.34 U5.44 U6.5
3.3V1 [vcc]: C17.1 C18.A C19.2 JP15.2 JP18.1 JP29.3 R20.2 R25.2 U2.1 U7.14 U7.24 U7.34 U7.44 U8.5
3.3V2 [vcc]: C27.1 C28.A C29.2 JP33.2 JP34.1 JP45.3 R34.2 R39.2 U9.1 U11.14 U11.24 U11.34 U11.44 U12.5
3.3V3 [vcc]: C37.1 C38.A C39.2 JP49.2 JP50.1 JP61.3 R48.2 R53.2 U13.1 U15.14 U15.24 U15.34 U15.44 U16.5
3.3V4 [vcc]: C47.1 C48.A C49.2 JP65.2 JP66.1 JP77.3 R62.2 R67.2 U17.1 U19.14 U19.24 U19.34 U19.44 U20.5
3.3V5 [vcc]: C57.1 C58.A C59.2 JP81.2 JP82.1 JP93.3 R76.2 R81.2 U21.1 U23.14 U23.24 U23.34 U23.44 U24.5
3.3V6 [vcc]: C67.1 C68.A C69.2 JP97.2 JP98.1 JP109.3 R90.2 R95.2 U25.1 U27.14 U27.24 U27.34 U27.44 U28.5
3.3V7 [vcc]: C77.1 C78.A C79.2 JP113.2 JP114.1 JP125.3 R104.2 R109.2 U29.1 U31.14 U31.24 U31.34 U31.44 U32.5
A0: JP2.12 U5.36
A1: JP2.11 U5.37
A2: JP2.10 U5.38
A3: JP2.9 U5.39
A4: JP2.8 U5.40
A5: JP2.7 U5.41
A6: JP29.12 U7.36
A7: JP29.11 U7.37
A8: JP29.10 U7.38
A9: JP29.9 U7.39
A10: JP29.8 U7.40
A11: JP29.7 U7.41
A12: JP45.12 U11.36
A13: JP45.11 U11.37
A14: JP45.10 U11.38
A15: JP45.9 U11.39
A16: JP45.8 U11.40
A17: JP45.7 U11.41
A18: JP61.12 U15.36
A19: JP61.11 U15.37
A20: JP61.10 U15.38
A21: JP61.9 U15.39
A22: JP61.8 U15.40
A23: JP61.7 U15.41
A24: JP77.12 U19.36
A25: JP77.11 U19.37
A26: JP77.10 U19.38
A27: JP77.9 U19.39
A28: JP77.8 U19.40
A29: JP77.7 U19.41
A30: JP93.12 U23.36
A31: JP93.11 U23.37
A32: JP93.10 U23.38
A33: JP93.9 U23.39
A34: JP93.8 U23.40
A35: JP93.7 U23.41
A36: JP109.12 U27.36
A37: JP109.11 U27.37
A38: JP109.10 U27.38
A39: JP109.9 U27.39
A40: JP109.8 U27.40
A41: JP109.7 U27.41
A42: JP125.12 U31.36
A43: JP125.11 U31.37
A44: JP125.10 U31.38
A45: JP125.9 U31.39
A46: JP125.8 U31.40
A47: JP125.7 U31.41
AREF: C4.2 JP2.2 U5.42
AREF1: C3.2 JP29.2 U7.42
AREF2: C22.2 JP45.2 U11.42
AREF3: C32.2 JP61.2 U15.42
AREF4: C42.2 JP77.2 U19.42
AREF5: C52.2 JP93.2 U23.42
AREF6: C62.2 JP109.2 U27.42
AREF7: C72.2 JP125.2 U31.42
ASSOCIATE: R1.2 U4.15
ASSOCIATE1: R28.2 U2.15
ASSOCIATE2: R42.2 U9.15
ASSOCIATE3: R56.2 U13.15
ASSOCIATE4: R70.2 U17.15
ASSOCIATE5: R84.2 U21.15
ASSOCIATE6: R98.2 U25.15
ASSOCIATE7: R112.2 U29.15
CHARGE_STAT: R9.1 U1.1 U5.32
CHARGE_STAT1: R18.1 U3.1 U7.32
CHARGE_STAT2: R32.1 U10.1 U11.32
CHARGE_STAT3: R46.1 U14.1 U15.32
CHARGE_STAT4: R60.1 U18.1 U19.32
CHARGE_STAT5: R74.1 U22.1 U23.32
CHARGE_STAT6: R88.1 U26.1 U27.32
CHARGE_STAT7: R102.1 U30.1 U31.32
CTS: JP8.1 U4.12
CTS1: JP23.1 U2.12
CTS2: JP39.1 U9.12
CTS3: JP55.1 U13.12
CTS4: JP71.1 U17.12
CTS5: JP87.1 U21.12
CTS6: JP103.1 U25.12
CTS7: JP119.1 U29.12
D1: JP18.3 U7.19
D2: JP1.3 U5.19
D3: JP1.4 U5.18
D4: JP1.5 U5.25
D5: JP1.6 U5.31
D6: JP1.7 U5.27
D7: JP1.8 U5.1
D8: JP1.9 U5.28
D9: JP1.10 U5.29
D10: JP1.11 U5.30
D11: JP1.12 U5.12
D12: JP18.4 U7.18
D13: JP18.5 U7.25
D14: JP1.13 R10.1 U5.8
D15: JP18.6 U7.31
D16: JP18.7 U7.27
D17: JP18.9 U7.28
D18: JP18.11 U7.30
D19: JP18.8 U7.1
D20: JP18.10 U7.29
D21: JP18.12 U7.12
D22: JP18.13 R22.1 U7.8
D23: JP34.3 U11.19
D24: JP34.4 U11.18
D25: JP34.5 U11.25
D26: JP34.6 U11.31
D27: JP34.7 U11.27
D28: JP34.9 U11.28
D29: JP34.11 U11.30
D30: JP34.8 U11.1
D31: JP34.10 U11.29
D32: JP34.12 U11.12
D33: JP34.13 R36.1 U11.8
D34: JP50.3 U15.19
D35: JP50.4 U15.18
D36: JP50.5 U15.25
D37: JP50.6 U15.31
D38: JP50.7 U15.27
D39: JP50.9 U15.28
D40: JP50.11 U15.30
D41: JP50.8 U15.1
D42: JP50.10 U15.29
D43: JP50.12 U15.12
D44: JP50.13 R50.1 U15.8
D45: JP66.3 U19.19
D46: JP66.4 U19.18
D47: JP66.5 U19.25
D48: JP66.6 U19.31
D49: JP66.7 U19.27
D50: JP66.9 U19.28
D51: JP66.11 U19.30
D52: JP66.8 U19.1
D53: JP66.10 U19.29
D54: JP66.12 U19.12
D55: JP66.13 R64.1 U19.8
D56: JP82.3 U23.19
D57: JP82.4 U23.18
D58: JP82.5 U23.25
D59: JP82.6 U23.31
D60: JP82.7 U23.27
D61: JP82.9 U23.28
D62: JP82.11 U23.30
D63: JP82.8 U23.1
D64: JP82.10 U23.29
D65: JP82.12 U23.12
D66: JP82.13 R78.1 U23.8
D67: JP98.3 U27.19
D68: JP98.4 U27.18
D69: JP98.5 U27.25
D70: JP98.6 U27.31
D71: JP98.7 U27.27
D72: JP98.9 U27.28
D73: JP98.11 U27.30
D74: JP98.8 U27.1
D75: JP98.10 U27.29
D76: JP98.12 U27.12
D77: JP98.13 R92.1 U27.8
D78: JP114.3 U31.19
D79: JP114.4 U31.18
D80: JP114.5 U31.25
D81: JP114.6 U31.31
D82: JP114.7 U31.27
D83: JP114.9 U31.28
D84: JP114.11 U31.30
D85: JP114.8 U31.1
D86: JP114.10 U31.29
D87: JP114.12 U31.12
D88: JP114.13 R106.1 U31.8
D+: R11.1 U5.4
D+1: R23.1 U7.4
D+2: R37.1 U11.4
D+3: R51.1 U15.4
D+4: R65.1 U19.4
D+5: R79.1 U23.4
D+6: R93.1 U27.4
D+7: R107.1 U31.4
D-: R12.1 U5.3
D-1: R24.1 U7.3
D-2: R38.1 U11.3
D-3: R52.1 U15.3
D-4: R66.1 U19.3
D-5: R80.1 U23.3
D-6: R94.1 U27.3
D-7: R108.1 U31.3
DTR: SJ1.2
DTR1: SJ3.2
DTR2: SJ5.2
DTR3: SJ7.2
DTR4: SJ9.2
DTR5: SJ11.2
DTR6: SJ13.2
DTR7: SJ15.2
GND: C1.C C4.1 C5.2 C7.2 C8.1 C9.2 C11.1 C12.2 C13.C C14.1 D1.C D2.C D3.C D5.C D6.C JP1.2 JP2.1 JP3.1 JP4.6 JP6.1 JP14.1 LED1.C R5.2 R15.1 S3.1 U1.2 U4.10 U5.5 U5.15 U5.23 U5.33 U5.35 U5.43 U6.2 X2.GND1
GND1: C2.2 C3.1 C6.2 C10.2 C15.1 C16.1 C17.2 C18.C C19.1 C20.C D7.C D8.C D10.C D11.C D12.C JP15.6 JP18.2 JP19.1 JP20.1 JP21.1 JP29.1 LED2.C R19.2 R27.1 S4.1 U2.10 U3.2 U7.5 U7.15 U7.23 U7.33 U7.35 U7.43 U8.2 X1.GND1
GND2: C21.2 C22.1 C23.2 C24.2 C25.1 C26.1 C27.2 C28.C C29.1 C30.C D13.C D14.C D16.C D17.C D18.C JP33.6 JP34.2 JP35.1 JP36.1 JP37.1 JP45.1 LED3.C R33.2 R41.1 S6.1 U9.10 U10.2 U11.5 U11.15 U11.23 U11.33 U11.35 U11.43 U12.2 X3.GND1
GND3: C31.2 C32.1 C33.2 C34.2 C35.1 C36.1 C37.2 C38.C C39.1 C40.C D19.C D20.C D22.C D23.C D24.C JP49.6 JP50.2 JP51.1 JP52.1 JP53.1 JP61.1 LED4.C R47.2 R55.1 S8.1 U13.10 U14.2 U15.5 U15.15 U15.23 U15.33 U15.35 U15.43 U16.2 X4.GND1
GND4: C41.2 C42.1 C43.2 C44.2 C45.1 C46.1 C47.2 C48.C C49.1 C50.C D25.C D26.C D28.C D29.C D30.C JP65.6 JP66.2 JP67.1 JP68.1 JP69.1 JP77.1 LED5.C R61.2 R69.1 S10.1 U17.10 U18.2 U19.5 U19.15 U19.23 U19.33 U19.35 U19.43 U20.2 X5.GND1
GND5: C51.2 C52.1 C53.2 C54.2 C55.1 C56.1 C57.2 C58.C C59.1 C60.C D31.C D32.C D34.C D35.C D36.C JP81.6 JP82.2 JP83.1 JP84.1 JP85.1 JP93.1 LED6.C R75.2 R83.1 S12.1 U21.10 U22.2 U23.5 U23.15 U23.23 U23.33 U23.35 U23.43 U24.2 X6.GND1
GND6: C61.2 C62.1 C63.2 C64.2 C65.1 C66.1 C67.2 C68.C C69.1 C70.C D37.C D38.C D40.C D41.C D42.C JP97.6 JP98.2 JP99.1 JP100.1 JP101.1 JP109.1 LED7.C R89.2 R97.1 S14.1 U25.10 U26.2 U27.5 U27.15 U27.23 U27.33 U27.35 U27.43 U28.2 X7.GND1
GND7: C71.2 C72.1 C73.2 C74.2 C75.1 C76.1 C77.2 C78.C C79.1 C80.C D43.C D44.C D46.C D47.C D48.C JP113.6 JP114.2 JP115.1 JP116.1 JP117.1 JP125.1 LED8.C R103.2 R111.1 S16.1 U29.10 U30.2 U31.5 U31.15 U31.23 U31.33 U31.35 U31.43 U32.2 X8.GND1
MISO: JP2.13 JP4.1 U5.11
MISO1: JP15.1 JP29.13 U7.11
MISO2: JP33.1 JP45.13 U11.11
MISO3: JP49.1 JP61.13 U15.11
MISO4: JP65.1 JP77.13 U19.11
MISO5: JP81.1 JP93.13 U23.11
MISO6: JP97.1 JP109.13 U27.11
MISO7: JP113.1 JP125.13 U31.11
MOSI: JP2.14 JP4.4 U5.10
MOSI1: JP15.4 JP29.14 U7.10
MOSI2: JP33.4 JP45.14 U11.10
MOSI3: JP49.4 JP61.14 U15.10
MOSI4: JP65.4 JP77.14 U19.10
MOSI5: JP81.4 JP93.14 U23.10
MOSI6: JP97.4 JP109.14 U27.10
MOSI7: JP113.4 JP125.14 U31.10
N$1: R3.2 TP2.P$1 U4.13
N$2: D1.A R1.1
N$3: D2.A R2.1
N$4: R2.2 TP1.P$1 U4.6
N$5: R11.2 X2.D+1
N$6: D3.A R3.1
N$7: R8.2 U4.3
N$8: D4.C R9.2
N$9: F1.2 JP7.2 S2.3
N$10: D7.A R4.1
N$11: R5.1 U1.5
N$12: R4.2 TP3.P$1 U2.6
N$13: SJ1.1 U4.17
N$14: D8.A R16.1
N$15: D5.A R7.2
N$16: C7.1 U5.16 Y2.1
N$17: C5.1 U5.17 Y2.3
N$18: R16.2 TP4.P$1 U2.13
N$19: D6.A R10.2
N$20: R12.2 X2.D-1
N$21: R17.2 U2.3
N$22: F2.2 JP22.2 S1.3
N$23: SJ3.1 U2.17
N$24: R19.1 U3.5
N$25: D9.C R18.2
N$26: D10.A R21.2
N$27: C10.1 U7.16 Y1.1
N$28: C6.1 U7.17 Y1.3
N$29: D11.A R22.2
N$30: R24.2 X1.D-1
N$31: LED2.A R25.1
N$32: D12.A R28.1
N$33: R23.2 X1.D+1
N$34: D13.A R29.1
N$35: R29.2 TP5.P$1 U9.6
N$36: D14.A R30.1
N$37: R30.2 TP6.P$1 U9.13
N$38: LED1.A R13.1
N$39: R31.2 U9.3
N$40: F3.2 JP38.2 S5.3
N$41: SJ5.1 U9.17
N$42: R33.1 U10.5
N$43: D15.C R32.2
N$44: D16.A R35.2
N$45: C24.1 U11.16 Y3.1
N$46: C23.1 U11.17 Y3.3
N$47: D17.A R36.2
N$48: R38.2 X3.D-1
N$49: LED3.A R39.1
N$50: D18.A R42.1
N$51: R37.2 X3.D+1
N$52: D19.A R43.1
N$53: R43.2 TP7.P$1 U13.6
N$54: D20.A R44.1
N$55: R44.2 TP8.P$1 U13.13
N$56: R45.2 U13.3
N$57: F4.2 JP54.2 S7.3
N$58: SJ7.1 U13.17
N$59: R47.1 U14.5
N$60: D21.C R46.2
N$61: D22.A R49.2
N$62: C34.1 U15.16 Y4.1
N$63: C33.1 U15.17 Y4.3
N$64: D23.A R50.2
N$65: R52.2 X4.D-1
N$66: LED4.A R53.1
N$67: D24.A R56.1
N$68: R51.2 X4.D+1
N$69: D25.A R57.1
N$70: R57.2 TP9.P$1 U17.6
N$71: D26.A R58.1
N$72: R58.2 TP10.P$1 U17.13
N$73: R59.2 U17.3
N$74: F5.2 JP70.2 S9.3
N$75: SJ9.1 U17.17
N$76: R61.1 U18.5
N$77: D27.C R60.2
N$78: D28.A R63.2
N$79: C44.1 U19.16 Y5.1
N$80: C43.1 U19.17 Y5.3
N$81: D29.A R64.2
N$82: R66.2 X5.D-1
N$83: LED5.A R67.1
N$84: D30.A R70.1
N$85: R65.2 X5.D+1
N$86: D31.A R71.1
N$87: R71.2 TP11.P$1 U21.6
N$88: D32.A R72.1
N$89: R72.2 TP12.P$1 U21.13
N$90: R73.2 U21.3
N$91: F6.2 JP86.2 S11.3
N$92: SJ11.1 U21.17
N$93: R75.1 U22.5
N$94: D33.C R74.2
N$95: D34.A R77.2
N$96: C54.1 U23.16 Y6.1
N$97: C53.1 U23.17 Y6.3
N$98: D35.A R78.2
N$99: R80.2 X6.D-1
N$100: LED6.A R81.1
N$101: D36.A R84.1
N$102: R79.2 X6.D+1
N$103: D37.A R85.1
N$104: R85.2 TP13.P$1 U25.6
N$105: D38.A R86.1
N$106: R86.2 TP14.P$1 U25.13
N$107: R87.2 U25.3
N$108: F7.2 JP102.2 S13.3
N$109: SJ13.1 U25.17
N$110: R89.1 U26.5
N$111: D39.C R88.2
N$112: D40.A R91.2
N$113: C64.1 U27.16 Y7.1
N$114: C63.1 U27.17 Y7.3
N$115: D41.A R92.2
N$116: R94.2 X7.D-1
N$117: LED7.A R95.1
N$118: D42.A R98.1
N$119: R93.2 X7.D+1
N$120: D43.A R99.1
N$121: R99.2 TP15.P$1 U29.6
N$122: D44.A R100.1
N$123: R100.2 TP16.P$1 U29.13
N$124: R101.2 U29.3
N$125: F8.2 JP118.2 S15.3
N$126: SJ15.1 U29.17
N$127: R103.1 U30.5
N$128: D45.C R102.2
N$129: D46.A R105.2
N$130: C74.1 U31.16 Y8.1
N$131: C73.1 U31.17 Y8.3
N$132: D47.A R106.2
N$133: R108.2 X8.D-1
N$134: LED8.A R109.1
N$135: D48.A R112.1
N$136: R107.2 X8.D+1
RAW [vcc]: JP7.1 S2.2 SJ2.1 U6.1 U6.3
RAW1 [vcc]: JP22.1 S1.2 SJ4.1 U8.1 U8.3
RAW2 [vcc]: JP38.1 S5.2 SJ6.1 U12.1 U12.3
RAW3 [vcc]: JP54.1 S7.2 SJ8.1 U16.1 U16.3
RAW4 [vcc]: JP70.1 S9.2 SJ10.1 U20.1 U20.3
RAW5 [vcc]: JP86.1 S11.2 SJ12.1 U24.1 U24.3
RAW6 [vcc]: JP102.1 S13.2 SJ14.1 U28.1 U28.3
RAW7 [vcc]: JP118.1 S15.2 SJ16.1 U32.1 U32.3
RST: JP2.6 JP4.5 R6.1 S3.3 U5.13
RST1: JP15.5 JP29.6 R20.1 S4.3 U7.13
RST2: JP33.5 JP45.6 R34.1 S6.3 U11.13
RST3: JP49.5 JP61.6 R48.1 S8.3 U15.13
RST4: JP65.5 JP77.6 R62.1 S10.3 U19.13
RST5: JP81.5 JP93.6 R76.1 S12.3 U23.13
RST6: JP97.5 JP109.6 R90.1 S14.3 U27.13
RST7: JP113.5 JP125.6 R104.1 S16.3 U31.13
RXI: JP2.4 U4.2 U5.20
RXI1: JP29.4 U2.2 U7.20
RXI2: JP45.4 U9.2 U11.20
RXI3: JP61.4 U13.2 U15.20
RXI4: JP77.4 U17.2 U19.20
RXI5: JP93.4 U21.2 U23.20
RXI6: JP109.4 U25.2 U27.20
RXI7: JP125.4 U29.2 U31.20
SCK: JP1.14 JP4.3 U5.9
SCK1: JP15.3 JP18.14 U7.9
SCK2: JP33.3 JP34.14 U11.9
SCK3: JP49.3 JP50.14 U15.9
SCK4: JP65.3 JP66.14 U19.9
SCK5: JP81.3 JP82.14 U23.9
SCK6: JP97.3 JP98.14 U27.9
SCK7: JP113.3 JP114.14 U31.9
SLEEP_RQ: JP9.1 U4.9
SLEEP_RQ1: JP24.1 U2.9
SLEEP_RQ2: JP40.1 U9.9
SLEEP_RQ3: JP56.1 U13.9
SLEEP_RQ4: JP72.1 U17.9
SLEEP_RQ5: JP88.1 U21.9
SLEEP_RQ6: JP104.1 U25.9
SLEEP_RQ7: JP120.1 U29.9
TXLED: R7.1 U5.22
TXLED1: R21.1 U7.22
TXLED2: R35.1 U11.22
TXLED3: R49.1 U15.22
TXLED4: R63.1 U19.22
TXLED5: R77.1 U23.22
TXLED6: R91.1 U27.22
TXLED7: R105.1 U31.22
TXO: JP2.5 R8.1 U5.21
TXO1: JP29.5 R17.1 U7.21
TXO2: JP45.5 R31.1 U11.21
TXO3: JP61.5 R45.1 U15.21
TXO4: JP77.5 R59.1 U19.21
TXO5: JP93.5 R73.1 U23.21
TXO6: JP109.5 R87.1 U27.21
TXO7: JP125.5 R101.1 U31.21
UCAP: C8.2 U5.6
UCAP1: C15.2 U7.6
UCAP2: C25.2 U11.6
UCAP3: C35.2 U15.6
UCAP4: C45.2 U19.6
UCAP5: C55.2 U23.6
UCAP6: C65.2 U27.6
UCAP7: C75.2 U31.6
USB_VCC: C9.1 C11.2 D4.A JP6.2 SJ2.2 U1.4 U5.2 U5.7 X2.VBUS
USB_VCC1: C2.1 C16.2 D9.A JP21.2 SJ4.2 U3.4 U7.2 U7.7 X1.VBUS
USB_VCC2: C21.1 C26.2 D15.A JP37.2 SJ6.2 U10.4 U11.2 U11.7 X3.VBUS
USB_VCC3: C31.1 C36.2 D21.A JP53.2 SJ8.2 U14.4 U15.2 U15.7 X4.VBUS
USB_VCC4: C41.1 C46.2 D27.A JP69.2 SJ10.2 U18.4 U19.2 U19.7 X5.VBUS
USB_VCC5: C51.1 C56.2 D33.A JP85.2 SJ12.2 U22.4 U23.2 U23.7 X6.VBUS
USB_VCC6: C61.1 C66.2 D39.A JP101.2 SJ14.2 U26.4 U27.2 U27.7 X7.VBUS
USB_VCC7: C71.1 C76.2 D45.A JP117.2 SJ16.2 U30.4 U31.2 U31.7 X8.VBUS
VBATT: C1.A F1.1 JP3.2 JP14.2 R14.2 U1.3
VBATT1: C20.A F2.1 JP19.2 JP20.2 R26.2 U3.3
VBATT2: C30.A F3.1 JP35.2 JP36.2 R40.2 U10.3
VBATT3: C40.A F4.1 JP51.2 JP52.2 R54.2 U14.3
VBATT4: C50.A F5.1 JP67.2 JP68.2 R68.2 U18.3
VBATT5: C60.A F6.1 JP83.2 JP84.2 R82.2 U22.3
VBATT6: C70.A F7.1 JP99.2 JP100.2 R96.2 U26.3
VBATT7: C80.A F8.1 JP115.2 JP116.2 R110.2 U30.3
VBATT_LVL: R14.1 R15.2 U5.26
VBATT_LVL1: R26.1 R27.2 U7.26
VBATT_LVL2: R40.1 R41.2 U11.26
VBATT_LVL3: R54.1 R55.2 U15.26
VBATT_LVL4: R68.1 R69.2 U19.26
VBATT_LVL5: R82.1 R83.2 U23.26
VBATT_LVL6: R96.1 R97.2 U27.26
VBATT_LVL7: R110.1 R111.2 U31.26

## Tracks (layer width: path | path; a pad name or v marks a point on that pad's centre or on a via)
3.3V  (via drill 0.38)
  Top 0.203: R13.2 C14.2 C12.1 24.44,52.16 23.89,52.71 C13.A 20.96,52.71 20.51,52.26 U6.5 19.59,53.82 v19.56,53.85 | v18.29,41.15 JP1.1 | JP4.2 18.92,20.19 19.56,20.19 20.19,20.83 20.95,20.83 21.84,21.72 21.84,22.73 21.59,22.99 21.48,22.99 21.45,23.02 U5.34 21.08,23.45 21.08,23.62 22.61,25.15 | 23.5,26.05 24.38,26.92 24.56,26.92 U5.44 24.93,26.51 25.27,26.16 26.16,26.16 27.81,27.81 27.81,36.07 | 23.5,26.05 | 22.61,25.15 23.5,26.05 | 22.61,25.15 22.1,25.65 18.54,25.65 17.65,26.54 17.42,26.54 U5.24 | U5.14 18.88,31.22 v18.69,31.22 17.94,31.97 R6.2 | v22.1,46.48 22.35,46.48 27.81,41.02 27.81,36.07 | JP2.3 27.81,36.07
  Bottom 0.203: JP1.1 9.4,50.56 U4.1 | v19.56,53.85 18.29,52.58 18.29,48.77 | 18.29,48.77 v18.29,41.15 18.29,31.62 v18.69,31.22 | v22.1,46.48 21.84,46.48 19.56,48.77 18.29,48.77
3.3V1  (via drill 0.38)
  Top 0.203: R25.2 C19.2 C17.1 52.89,52.16 52.34,52.71 C18.A 49.41,52.71 48.96,52.26 U8.5 48.04,53.82 v48.01,53.85 | v46.74,41.15 JP18.1 | JP15.2 47.37,20.19 48.01,20.19 48.64,20.83 49.4,20.83 50.29,21.72 50.29,22.73 50.04,22.99 49.93,22.99 49.9,23.02 U7.34 49.53,23.45 49.53,23.62 51.05,25.15 | 51.95,26.05 52.83,26.92 53.01,26.92 U7.44 53.37,26.51 53.72,26.16 54.61,26.16 56.26,27.81 56.26,36.07 | 51.95,26.05 | 51.05,25.15 51.95,26.05 | 51.05,25.15 50.55,25.65 46.99,25.65 46.1,26.54 45.87,26.54 U7.24 | U7.14 47.33,31.22 v47.14,31.22 46.39,31.97 R20.2 | v50.55,46.48 50.8,46.48 56.26,41.02 56.26,36.07 | JP29.3 56.26,36.07
  Bottom 0.203: JP18.1 37.85,50.56 U2.1 | v48.01,53.85 46.74,52.58 46.74,48.77 | 46.74,48.77 v46.74,41.15 46.74,31.62 v47.14,31.22 | v50.55,46.48 50.29,46.48 48.01,48.77 46.74,48.77
3.3V2  (via drill 0.38)
  Top 0.203: R39.2 C29.2 C27.1 81.33,52.16 80.78,52.71 C28.A 77.85,52.71 77.4,52.26 U12.5 76.48,53.82 v76.45,53.85 | v75.18,41.15 JP34.1 | JP33.2 75.82,20.19 76.45,20.19 77.09,20.83 77.85,20.83 78.74,21.72 78.74,22.73 78.49,22.99 78.38,22.99 78.34,23.02 U11.34 77.98,23.45 77.98,23.62 79.5,25.15 | 80.4,26.05 81.28,26.92 81.45,26.92 U11.44 81.82,26.51 82.17,26.16 83.06,26.16 84.71,27.81 84.71,36.07 | 80.4,26.05 | 79.5,25.15 80.4,26.05 | 79.5,25.15 78.99,25.65 75.44,25.65 74.55,26.54 74.32,26.54 U11.24 | U11.14 75.78,31.22 v75.59,31.22 74.84,31.97 R34.2 | v78.99,46.48 79.25,46.48 84.71,41.02 84.71,36.07 | JP45.3 84.71,36.07
  Bottom 0.203: JP34.1 66.29,50.56 U9.1 | v76.45,53.85 75.18,52.58 75.18,48.77 | 75.18,48.77 v75.18,41.15 75.18,31.62 v75.59,31.22 | v78.99,46.48 78.74,46.48 76.45,48.77 75.18,48.77
3.3V3  (via drill 0.38)
  Top 0.203: R53.2 C39.2 C37.1 109.78,52.16 109.23,52.71 C38.A 106.3,52.71 105.85,52.26 U16.5 104.93,53.82 v104.9,53.85 | v103.63,41.15 JP50.1 | JP49.2 104.27,20.19 104.9,20.19 105.54,20.83 106.3,20.83 107.19,21.72 107.19,22.73 106.93,22.99 106.83,22.99 106.79,23.02 U15.34 106.43,23.45 106.43,23.62 107.95,25.15 | 108.85,26.05 109.73,26.92 109.9,26.92 U15.44 110.27,26.51 110.62,26.16 111.51,26.16 113.16,27.81 113.16,36.07 | 108.85,26.05 | 107.95,25.15 108.85,26.05 | 107.95,25.15 107.44,25.65 103.89,25.65 103,26.54 102.77,26.54 U15.24 | U15.14 104.22,31.22 v104.04,31.22 103.28,31.97 R48.2 | v107.44,46.48 107.7,46.48 113.16,41.02 113.16,36.07 | JP61.3 113.16,36.07
  Bottom 0.203: JP50.1 94.74,50.56 U13.1 | v104.9,53.85 103.63,52.58 103.63,48.77 | 103.63,48.77 v103.63,41.15 103.63,31.62 v104.04,31.22 | v107.44,46.48 107.19,46.48 104.9,48.77 103.63,48.77
3.3V4  (via drill 0.38)
  Top 0.203: R67.2 C49.2 C47.1 24.44,124.55 23.89,125.1 C48.A 20.96,125.1 20.51,124.65 U20.5 19.59,126.21 v19.56,126.24 | v18.29,113.54 JP66.1 | JP65.2 18.92,92.58 19.56,92.58 20.19,93.22 20.95,93.22 21.84,94.11 21.84,95.12 21.59,95.38 21.48,95.38 21.45,95.41 U19.34 21.08,95.84 21.08,96.01 22.61,97.54 | 23.5,98.44 24.38,99.31 24.56,99.31 U19.44 24.93,98.9 25.27,98.55 26.16,98.55 27.81,100.2 27.81,108.46 | 23.5,98.44 | 22.61,97.54 23.5,98.44 | 22.61,97.54 22.1,98.04 18.54,98.04 17.65,98.93 17.42,98.93 U19.24 | U19.14 18.88,103.61 v18.69,103.61 17.94,104.36 R62.2 | v22.1,118.87 22.35,118.87 27.81,113.41 27.81,108.46 | JP77.3 27.81,108.46
  Bottom 0.203: JP66.1 9.4,122.95 U17.1 | v19.56,126.24 18.29,124.97 18.29,121.16 | 18.29,121.16 v18.29,113.54 18.29,104.01 v18.69,103.61 | v22.1,118.87 21.84,118.87 19.56,121.16 18.29,121.16
3.3V5  (via drill 0.38)
  Top 0.203: R81.2 C59.2 C57.1 52.89,124.55 52.34,125.1 C58.A 49.41,125.1 48.96,124.65 U24.5 48.04,126.21 v48.01,126.24 | v46.74,113.54 JP82.1 | JP81.2 47.37,92.58 48.01,92.58 48.64,93.22 49.4,93.22 50.29,94.11 50.29,95.12 50.04,95.38 49.93,95.38 49.9,95.41 U23.34 49.53,95.84 49.53,96.01 51.05,97.54 | 51.95,98.44 52.83,99.31 53.01,99.31 U23.44 53.37,98.9 53.72,98.55 54.61,98.55 56.26,100.2 56.26,108.46 | 51.95,98.44 | 51.05,97.54 51.95,98.44 | 51.05,97.54 50.55,98.04 46.99,98.04 46.1,98.93 45.87,98.93 U23.24 | U23.14 47.33,103.61 v47.14,103.61 46.39,104.36 R76.2 | v50.55,118.87 50.8,118.87 56.26,113.41 56.26,108.46 | JP93.3 56.26,108.46
  Bottom 0.203: JP82.1 37.85,122.95 U21.1 | v48.01,126.24 46.74,124.97 46.74,121.16 | 46.74,121.16 v46.74,113.54 46.74,104.01 v47.14,103.61 | v50.55,118.87 50.29,118.87 48.01,121.16 46.74,121.16
3.3V6  (via drill 0.38)
  Top 0.203: R95.2 C69.2 C67.1 81.33,124.55 80.78,125.1 C68.A 77.85,125.1 77.4,124.65 U28.5 76.48,126.21 v76.45,126.24 | v75.18,113.54 JP98.1 | JP97.2 75.82,92.58 76.45,92.58 77.09,93.22 77.85,93.22 78.74,94.11 78.74,95.12 78.49,95.38 78.38,95.38 78.34,95.41 U27.34 77.98,95.84 77.98,96.01 79.5,97.54 | 80.4,98.44 81.28,99.31 81.45,99.31 U27.44 81.82,98.9 82.17,98.55 83.06,98.55 84.71,100.2 84.71,108.46 | 80.4,98.44 | 79.5,97.54 80.4,98.44 | 79.5,97.54 78.99,98.04 75.44,98.04 74.55,98.93 74.32,98.93 U27.24 | U27.14 75.78,103.61 v75.59,103.61 74.84,104.36 R90.2 | v78.99,118.87 79.25,118.87 84.71,113.41 84.71,108.46 | JP109.3 84.71,108.46
  Bottom 0.203: JP98.1 66.29,122.95 U25.1 | v76.45,126.24 75.18,124.97 75.18,121.16 | 75.18,121.16 v75.18,113.54 75.18,104.01 v75.59,103.61 | v78.99,118.87 78.74,118.87 76.45,121.16 75.18,121.16
3.3V7  (via drill 0.38)
  Top 0.203: R109.2 C79.2 C77.1 109.78,124.55 109.23,125.1 C78.A 106.3,125.1 105.85,124.65 U32.5 104.93,126.21 v104.9,126.24 | v103.63,113.54 JP114.1 | JP113.2 104.27,92.58 104.9,92.58 105.54,93.22 106.3,93.22 107.19,94.11 107.19,95.12 106.93,95.38 106.83,95.38 106.79,95.41 U31.34 106.43,95.84 106.43,96.01 107.95,97.54 | 108.85,98.44 109.73,99.31 109.9,99.31 U31.44 110.27,98.9 110.62,98.55 111.51,98.55 113.16,100.2 113.16,108.46 | 108.85,98.44 | 107.95,97.54 108.85,98.44 | 107.95,97.54 107.44,98.04 103.89,98.04 103,98.93 102.77,98.93 U31.24 | U31.14 104.22,103.61 v104.04,103.61 103.28,104.36 R104.2 | v107.44,118.87 107.7,118.87 113.16,113.41 113.16,108.46 | JP125.3 113.16,108.46
  Bottom 0.203: JP114.1 94.74,122.95 U29.1 | v104.9,126.24 103.63,124.97 103.63,121.16 | 103.63,121.16 v103.63,113.54 103.63,104.01 v104.04,103.61 | v107.44,118.87 107.19,118.87 104.9,121.16 103.63,121.16
A0
  Top 0.203: JP2.12 29.72,15.75 29.72,18.92 27.3,21.34 24.13,21.34 22.61,22.86 22.61,23.31 U5.36
A1
  Top 0.203: JP2.11 31.37,15.75 30.61,16.51 30.61,18.92 27.81,21.72 24.38,21.72 22.99,23.11 22.99,23.64 U5.37
A2
  Top 0.203: JP2.10 28.45,22.1 24.64,22.1 23.37,23.37 23.37,23.93 U5.38
A3
  Top 0.203: JP2.9 30.61,22.48 24.89,22.48 23.75,23.62 23.75,24.26 U5.39
A4
  Top 0.203: JP2.8 31.5,23.37 30.99,22.86 25.15,22.86 24.13,23.88 24.13,24.58 U5.40
A5
  Top 0.203: U5.41 24.51,24.88 24.51,24.13 25.4,23.24 30.23,23.24 32.26,25.27 JP2.7
A6
  Top 0.203: JP29.12 58.17,15.75 58.17,18.92 55.75,21.34 52.58,21.34 51.05,22.86 51.05,23.31 U7.36
A7
  Top 0.203: JP29.11 59.82,15.75 59.05,16.51 59.05,18.92 56.26,21.72 52.83,21.72 51.44,23.11 51.44,23.64 U7.37
A8
  Top 0.203: JP29.10 56.9,22.1 53.09,22.1 51.82,23.37 51.82,23.93 U7.38
A9
  Top 0.203: JP29.9 59.05,22.48 53.34,22.48 52.2,23.62 52.2,24.26 U7.39
A10
  Top 0.203: JP29.8 59.94,23.37 59.44,22.86 53.59,22.86 52.58,23.88 52.58,24.58 U7.40
A11
  Top 0.203: U7.41 52.96,24.88 52.96,24.13 53.85,23.24 58.67,23.24 60.71,25.27 JP29.7
A12
  Top 0.203: JP45.12 86.61,15.75 86.61,18.92 84.2,21.34 81.03,21.34 79.5,22.86 79.5,23.31 U11.36
A13
  Top 0.203: JP45.11 88.27,15.75 87.5,16.51 87.5,18.92 84.71,21.72 81.28,21.72 79.88,23.11 79.88,23.64 U11.37
A14
  Top 0.203: JP45.10 85.34,22.1 81.53,22.1 80.26,23.37 80.26,23.93 U11.38
A15
  Top 0.203: JP45.9 87.5,22.48 81.79,22.48 80.64,23.62 80.64,24.26 U11.39
A16
  Top 0.203: JP45.8 88.39,23.37 87.88,22.86 82.04,22.86 81.03,23.88 81.03,24.58 U11.40
A17
  Top 0.203: U11.41 81.41,24.88 81.41,24.13 82.3,23.24 87.12,23.24 89.15,25.27 JP45.7
A18
  Top 0.203: JP61.12 115.06,15.75 115.06,18.92 112.65,21.34 109.47,21.34 107.95,22.86 107.95,23.31 U15.36
A19
  Top 0.203: JP61.11 116.71,15.75 115.95,16.51 115.95,18.92 113.16,21.72 109.73,21.72 108.33,23.11 108.33,23.64 U15.37
A20
  Top 0.203: JP61.10 113.79,22.1 109.98,22.1 108.71,23.37 108.71,23.93 U15.38
A21
  Top 0.203: JP61.9 115.95,22.48 110.24,22.48 109.09,23.62 109.09,24.26 U15.39
A22
  Top 0.203: JP61.8 116.84,23.37 116.33,22.86 110.49,22.86 109.47,23.88 109.47,24.58 U15.40
A23
  Top 0.203: U15.41 109.86,24.88 109.86,24.13 110.74,23.24 115.57,23.24 117.6,25.27 JP61.7
A24
  Top 0.203: JP77.12 29.72,88.14 29.72,91.31 27.3,93.73 24.13,93.73 22.61,95.25 22.61,95.7 U19.36
A25
  Top 0.203: JP77.11 31.37,88.14 30.61,88.9 30.61,91.31 27.81,94.11 24.38,94.11 22.99,95.5 22.99,96.03 U19.37
A26
  Top 0.203: JP77.10 28.45,94.49 24.64,94.49 23.37,95.76 23.37,96.32 U19.38
A27
  Top 0.203: JP77.9 30.61,94.87 24.89,94.87 23.75,96.01 23.75,96.65 U19.39
A28
  Top 0.203: JP77.8 31.5,95.76 30.99,95.25 25.15,95.25 24.13,96.27 24.13,96.97 U19.40
A29